# Altium PCB BEAGLEPLAYV020_220915.brd.PcbDoc (part 1 of 12)
Units mil, origin at the board's own origin, x right, y up, seen from the top; angles counter-clockwise.
Board outline 3149.7 x 3149.7 mil, 8 copper layers (TOP, LYR2_GND, LYR3, LAY4_PWR1, LAY5_PWR2, LAY6, LYR7_GND, BOTTOM), stack 60.84 mil thick; 782 components, 546 nets, 2864 pads, 2056 vias.
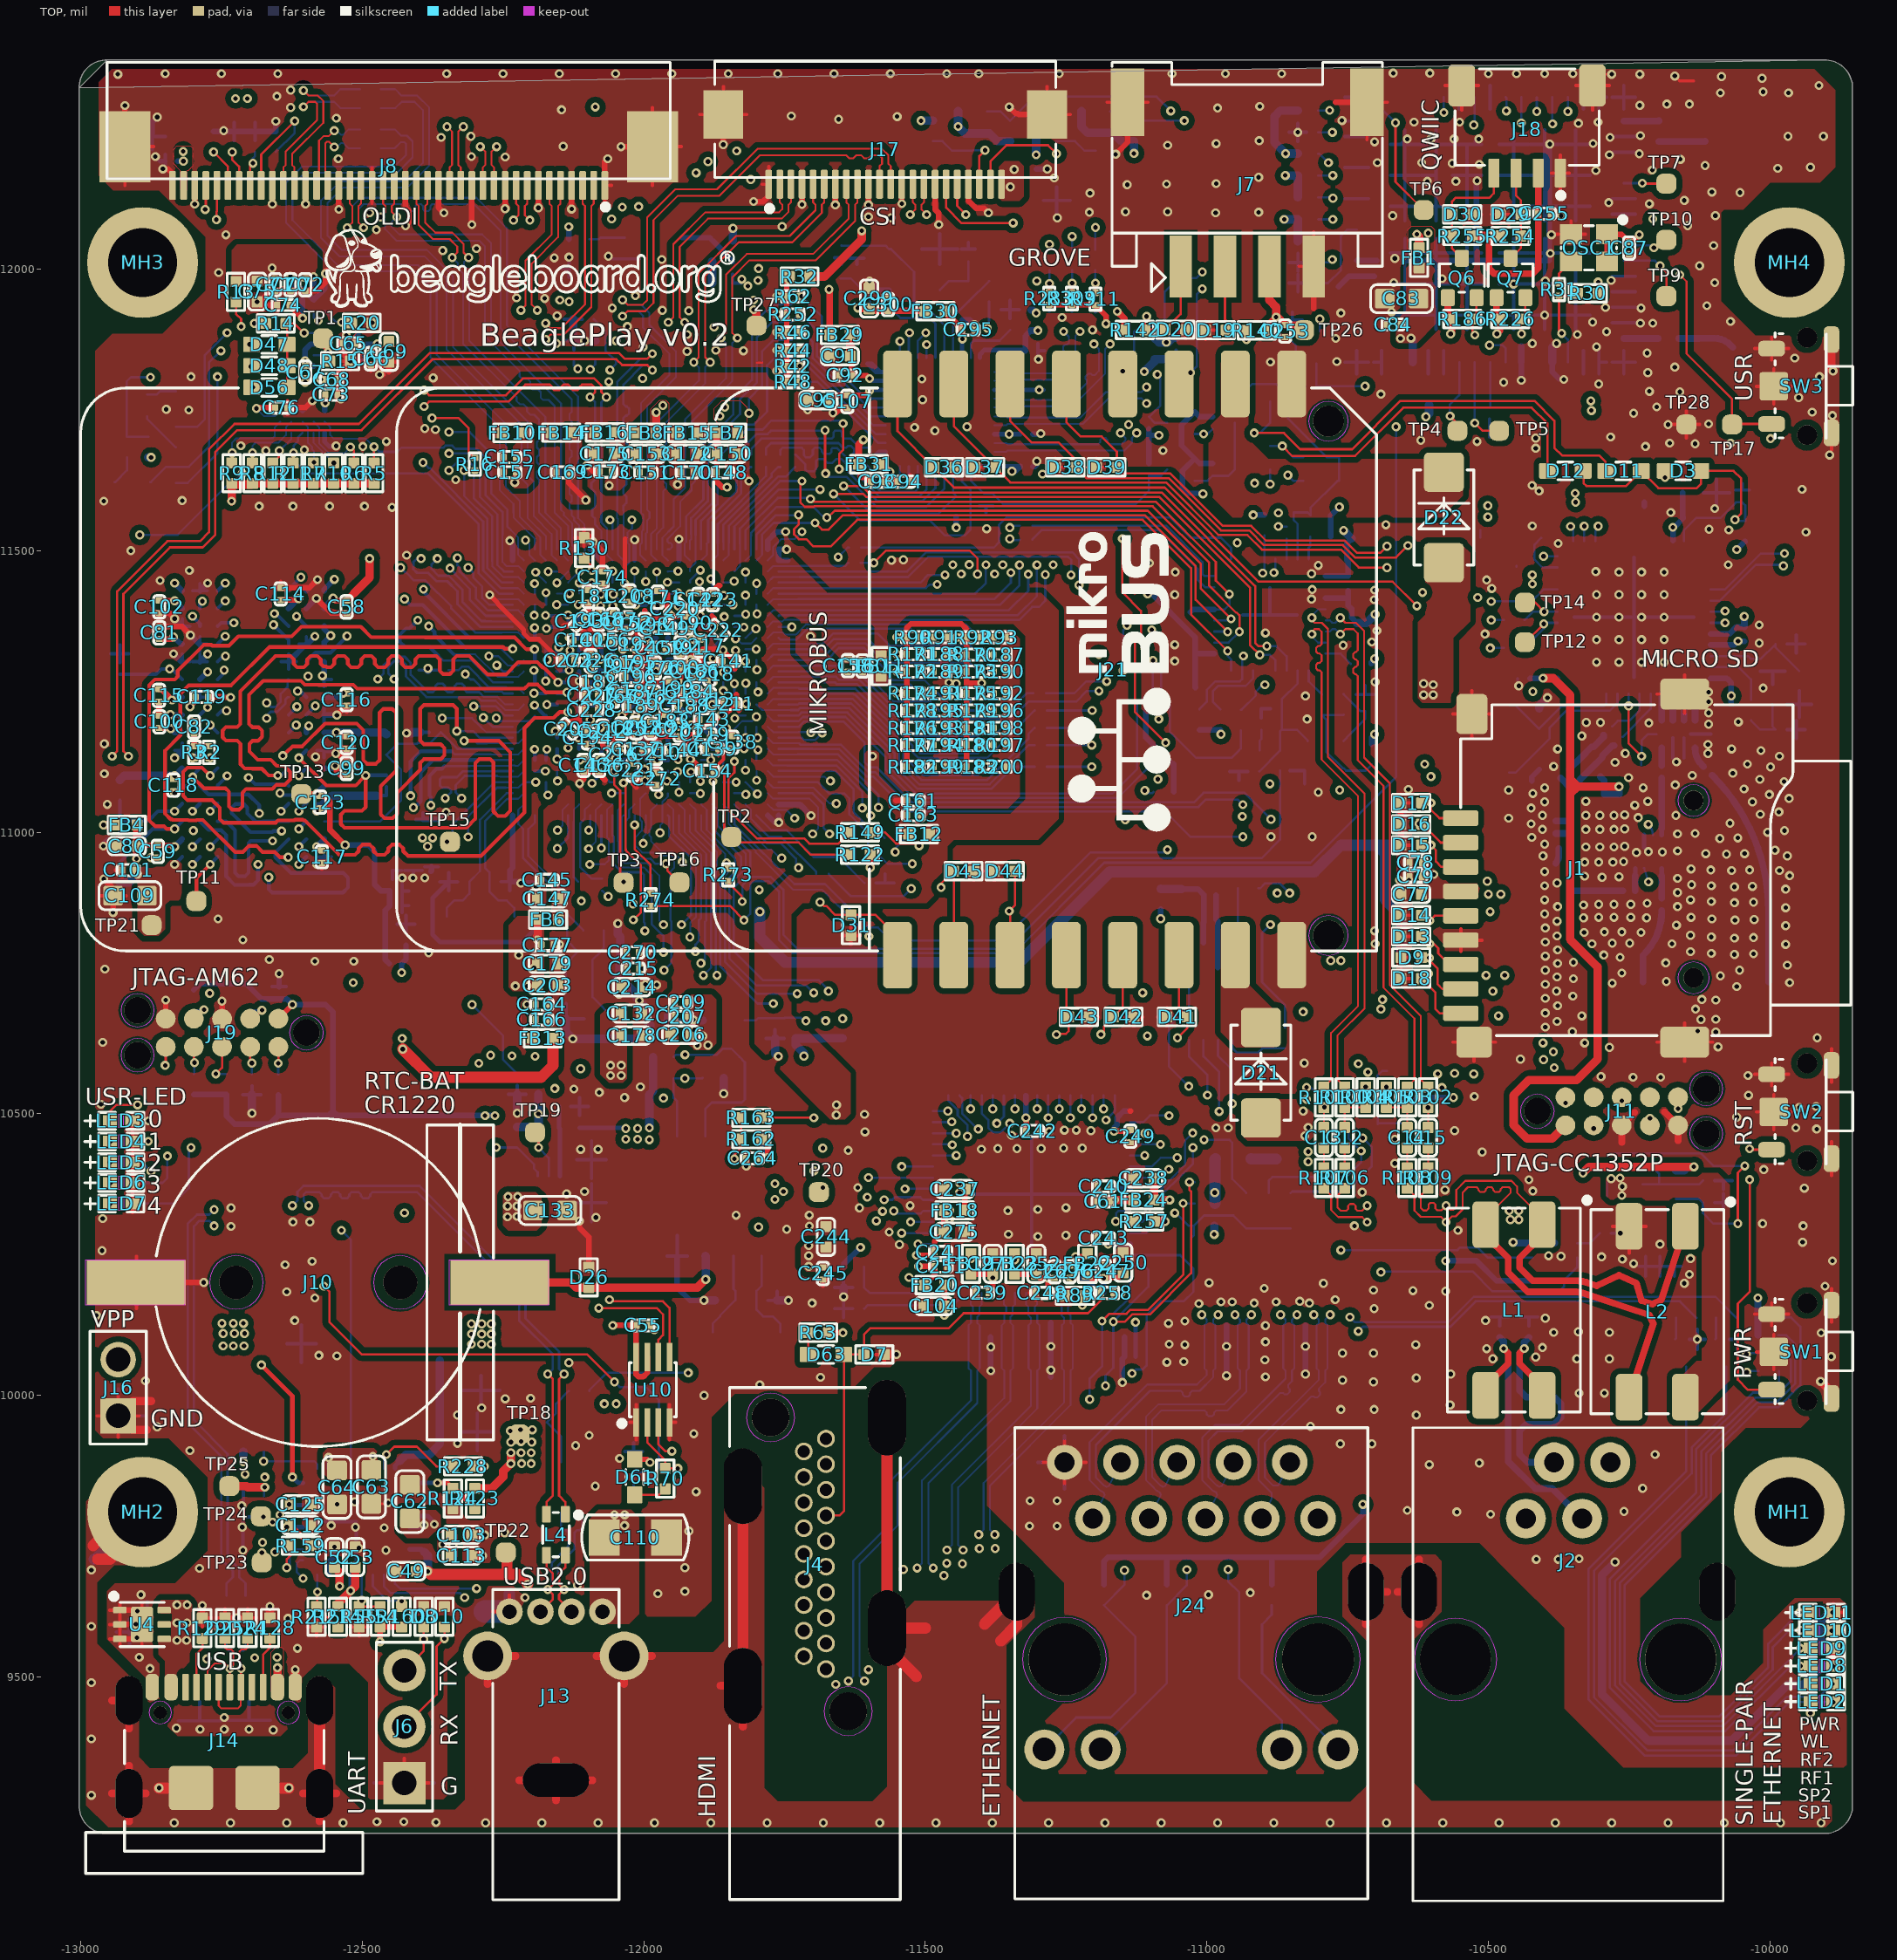
[diagram p0: TOP view]
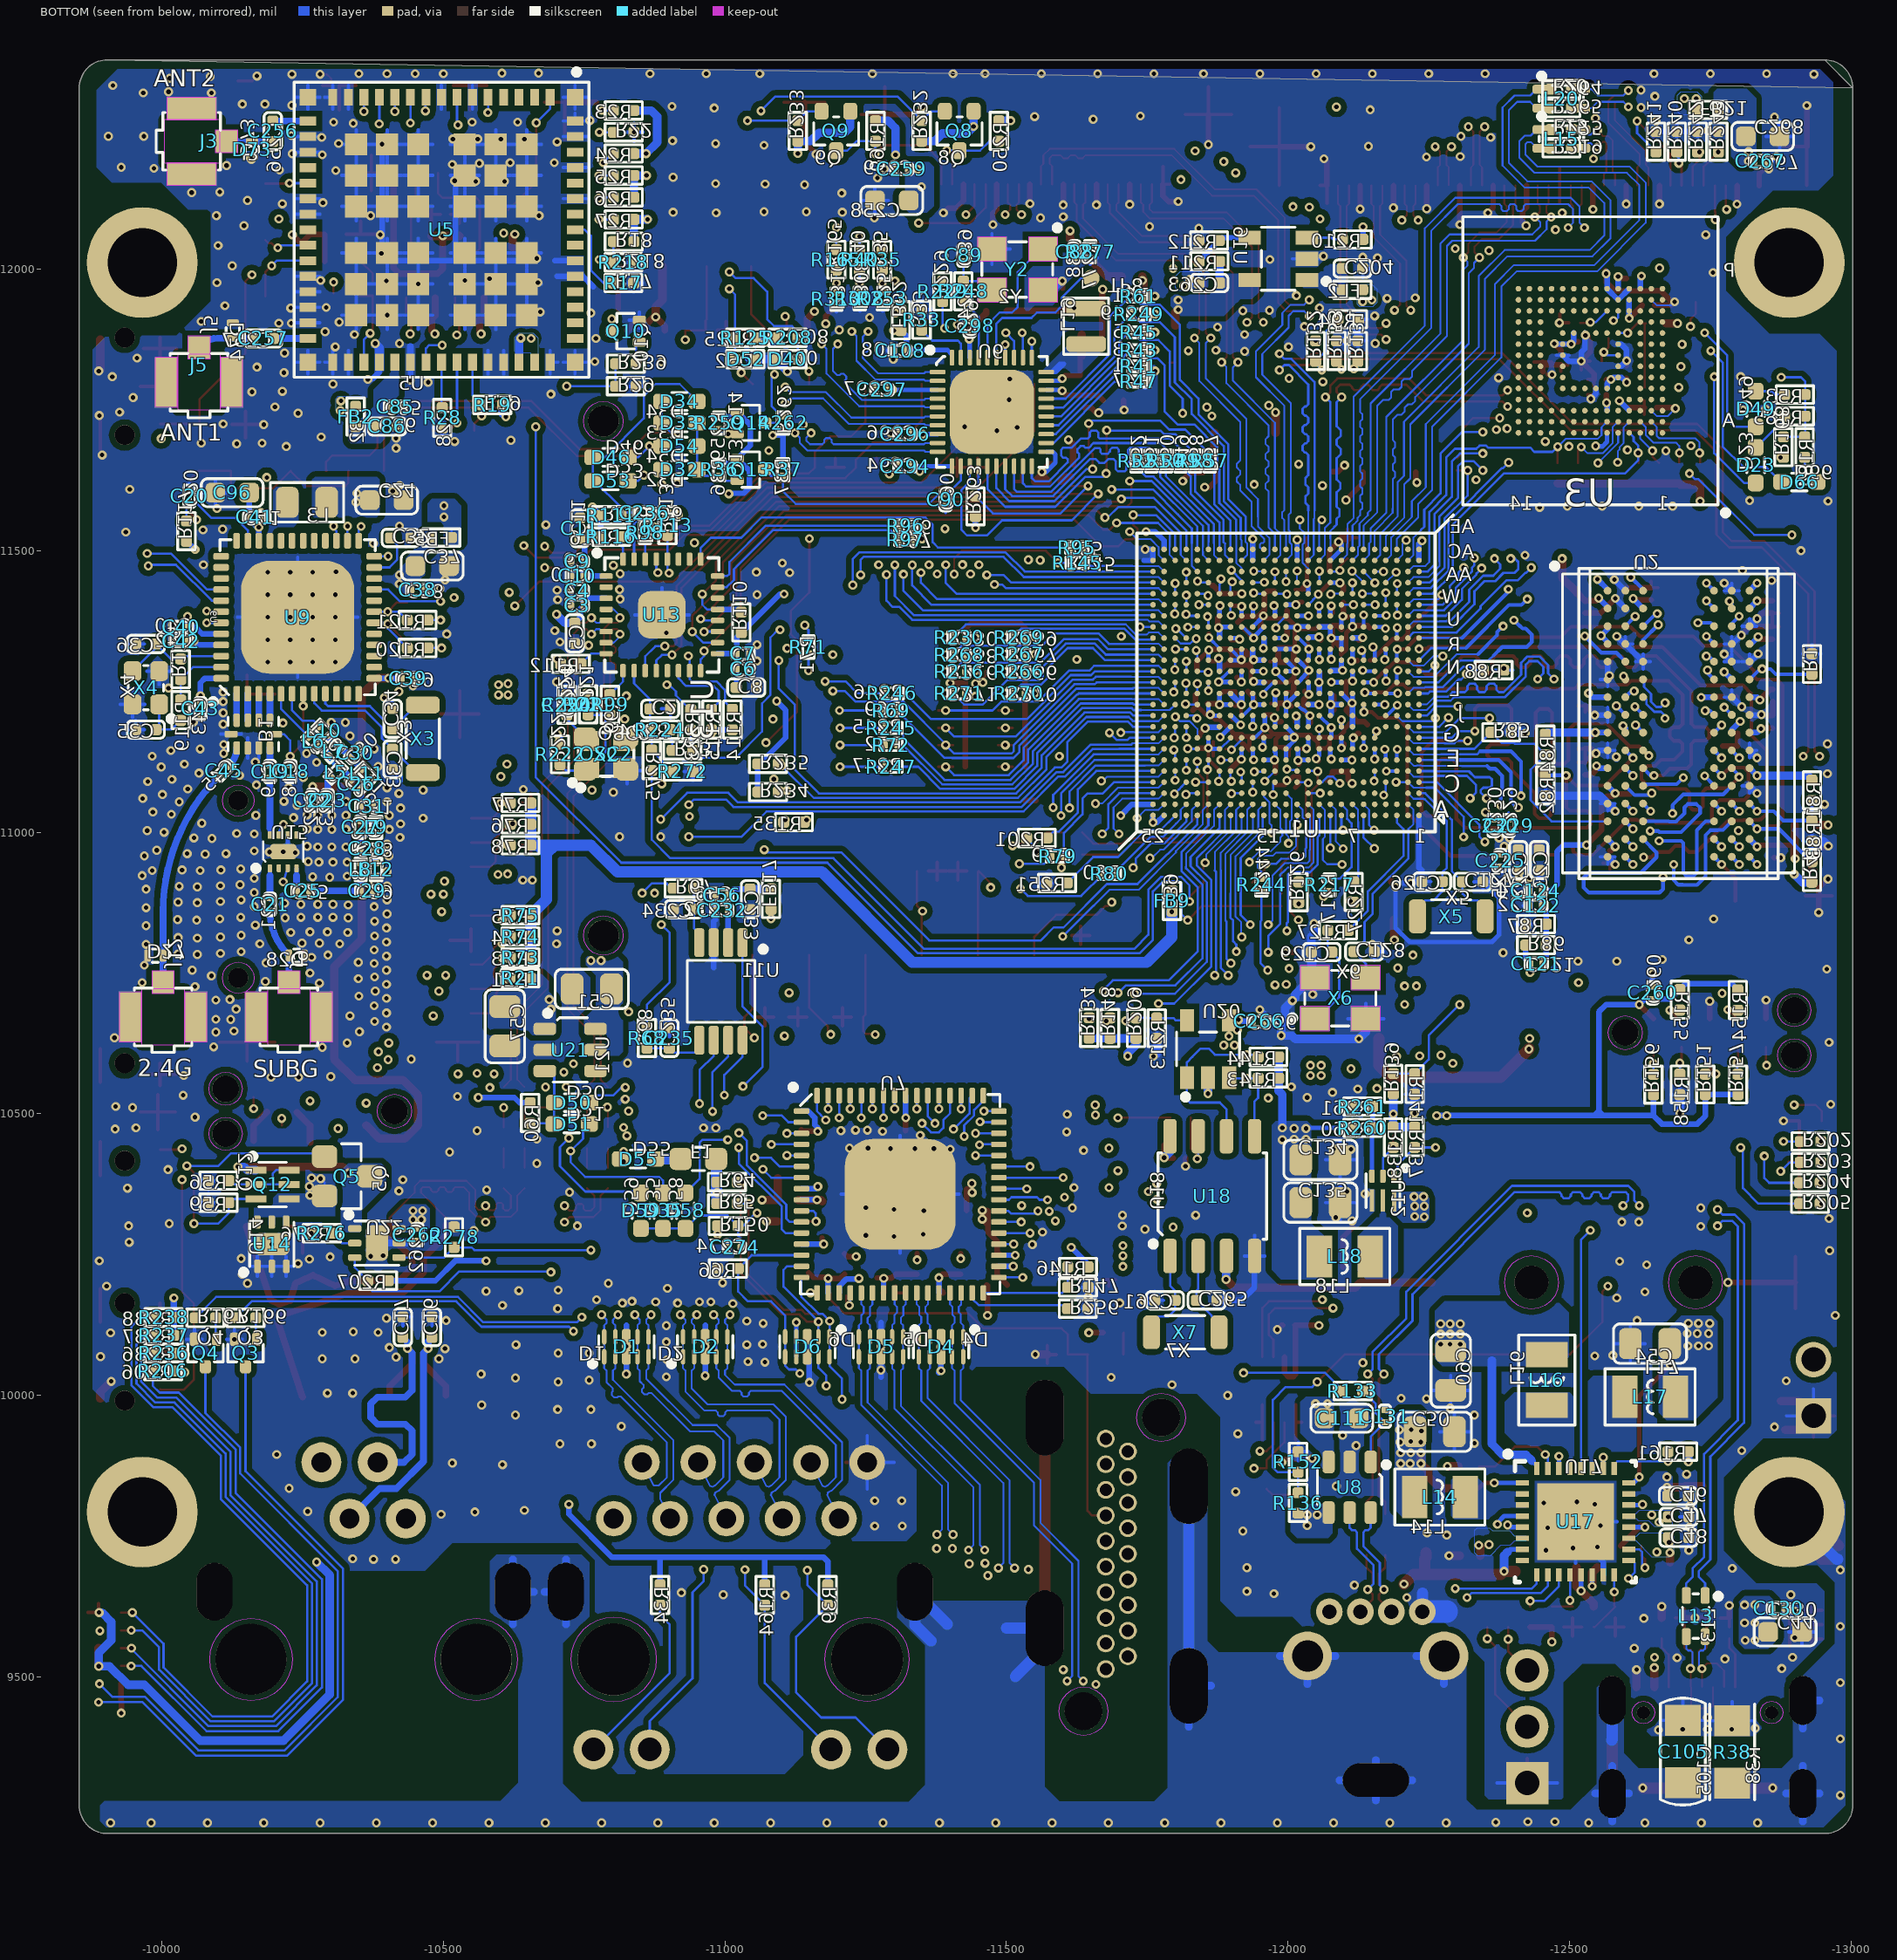
[diagram p1: BOTTOM view, seen from below]
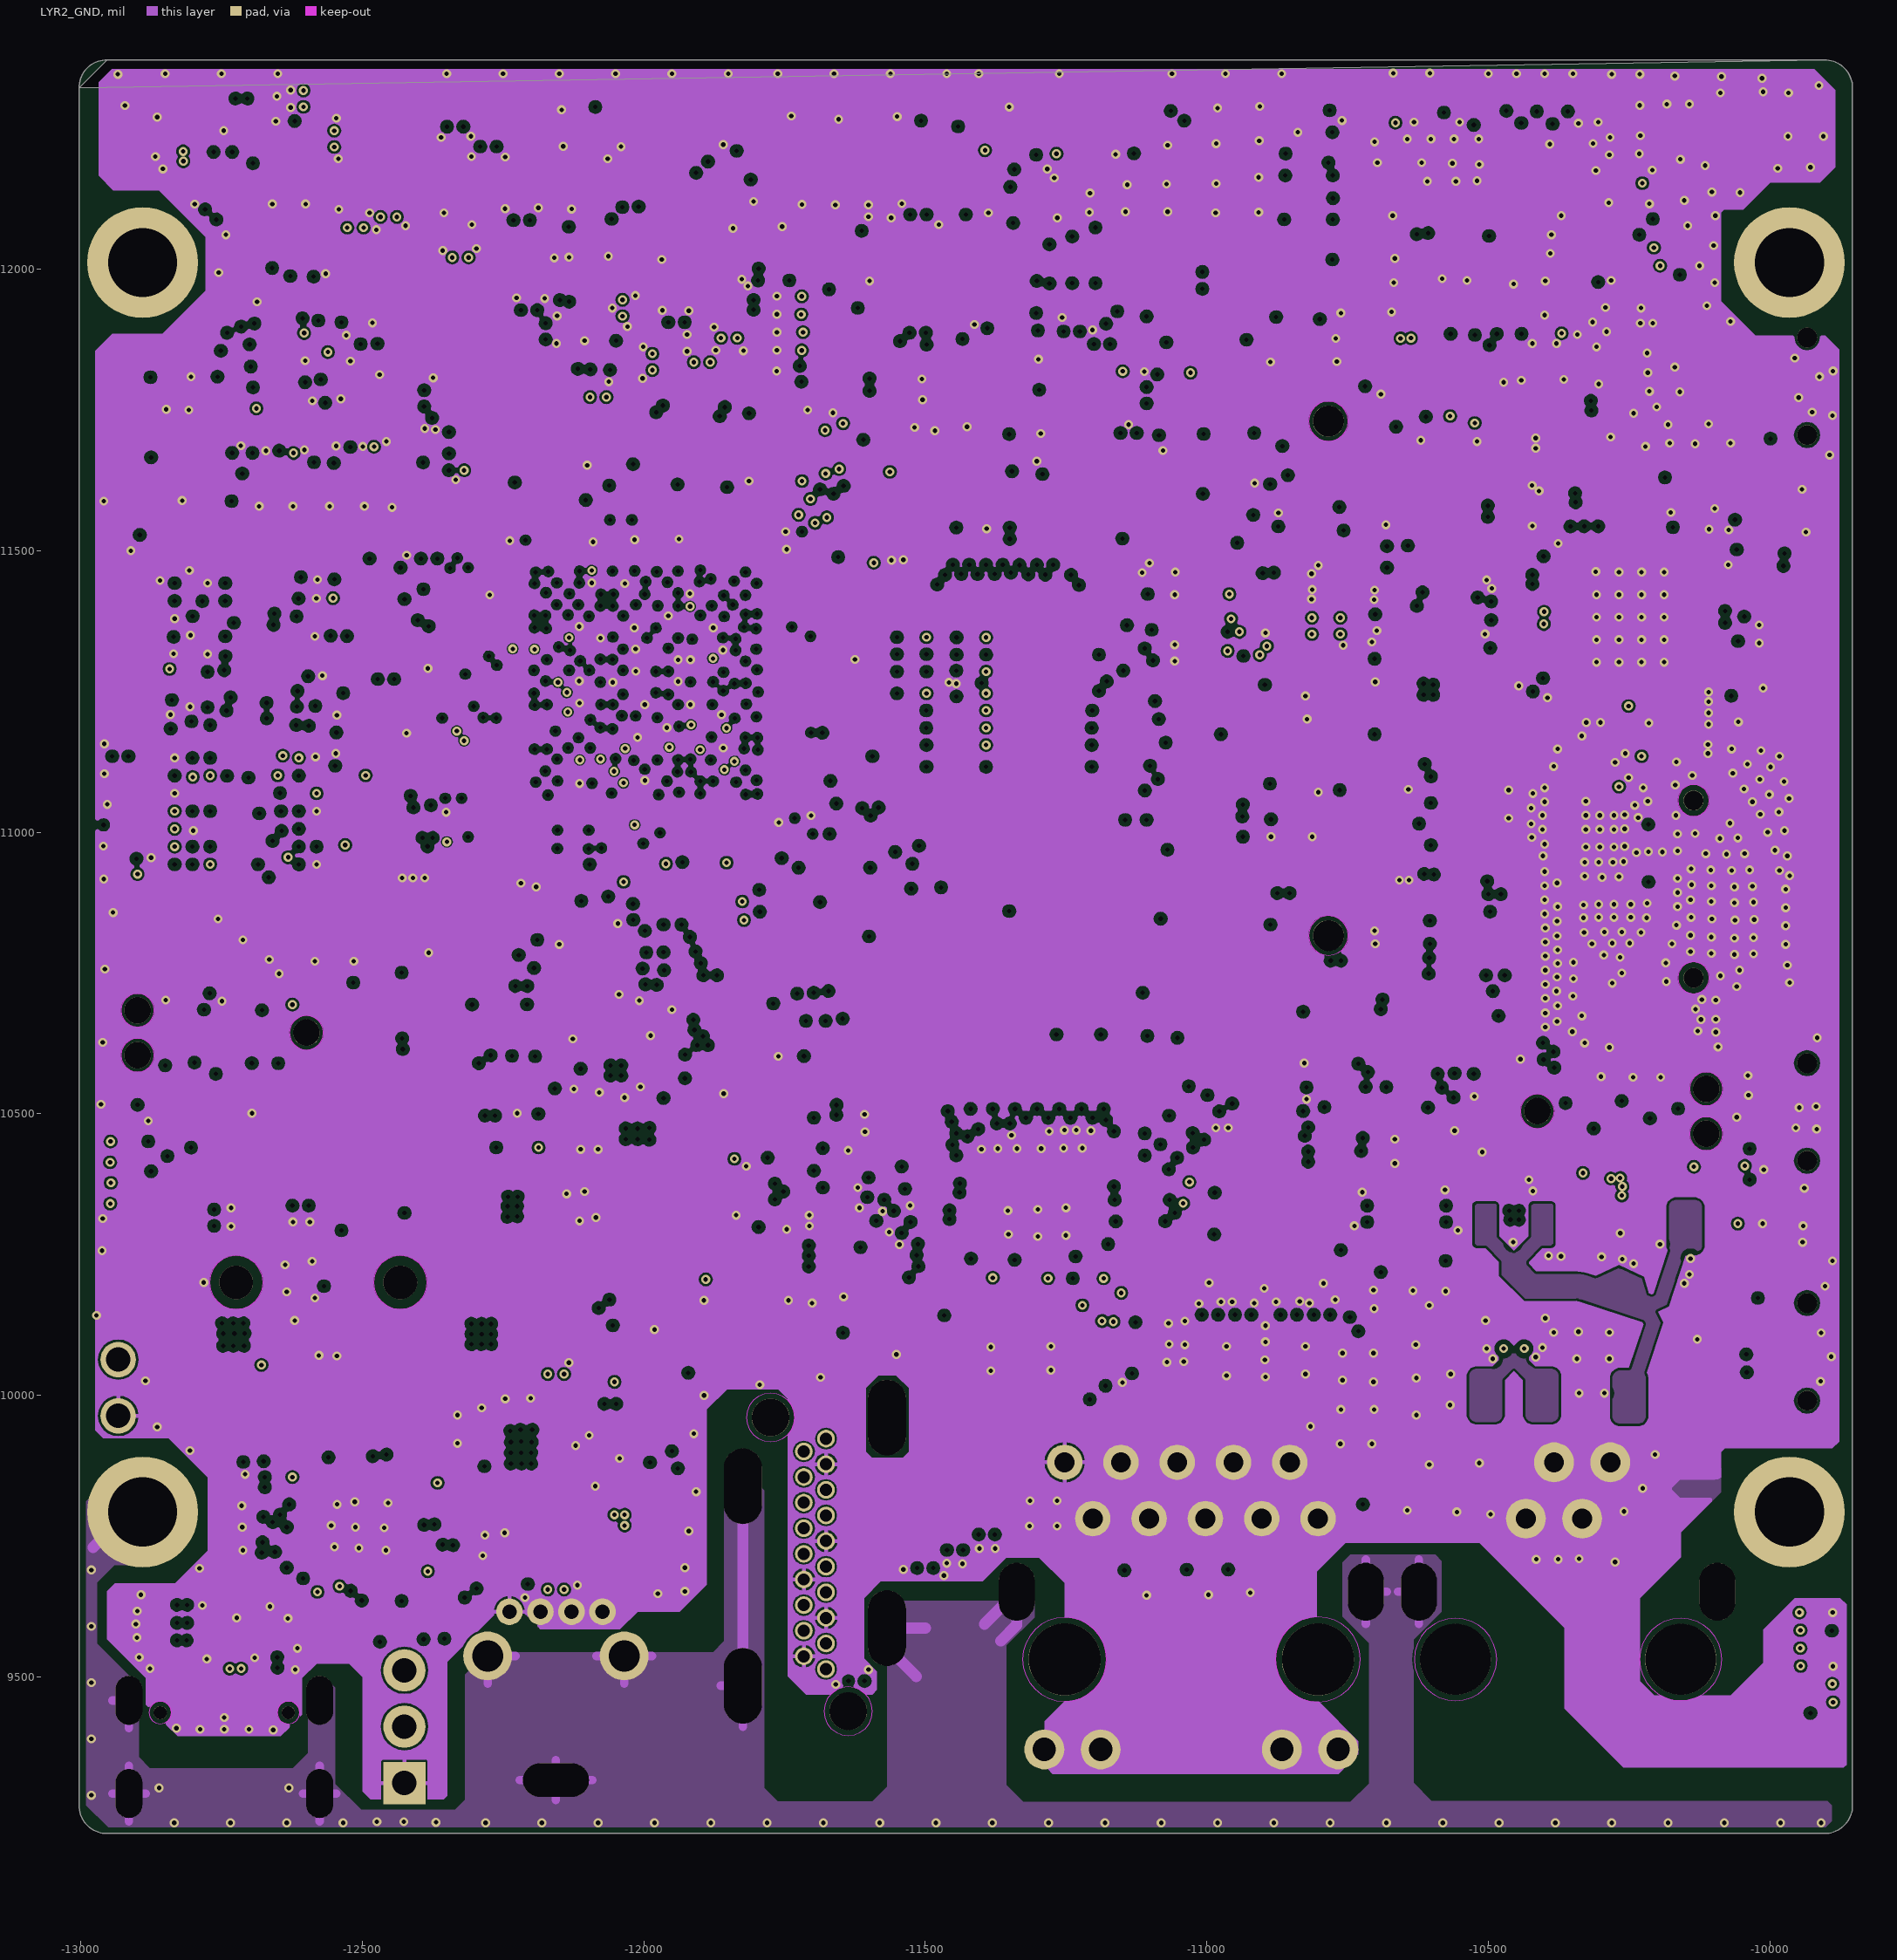
[diagram p2: LYR2_GND]
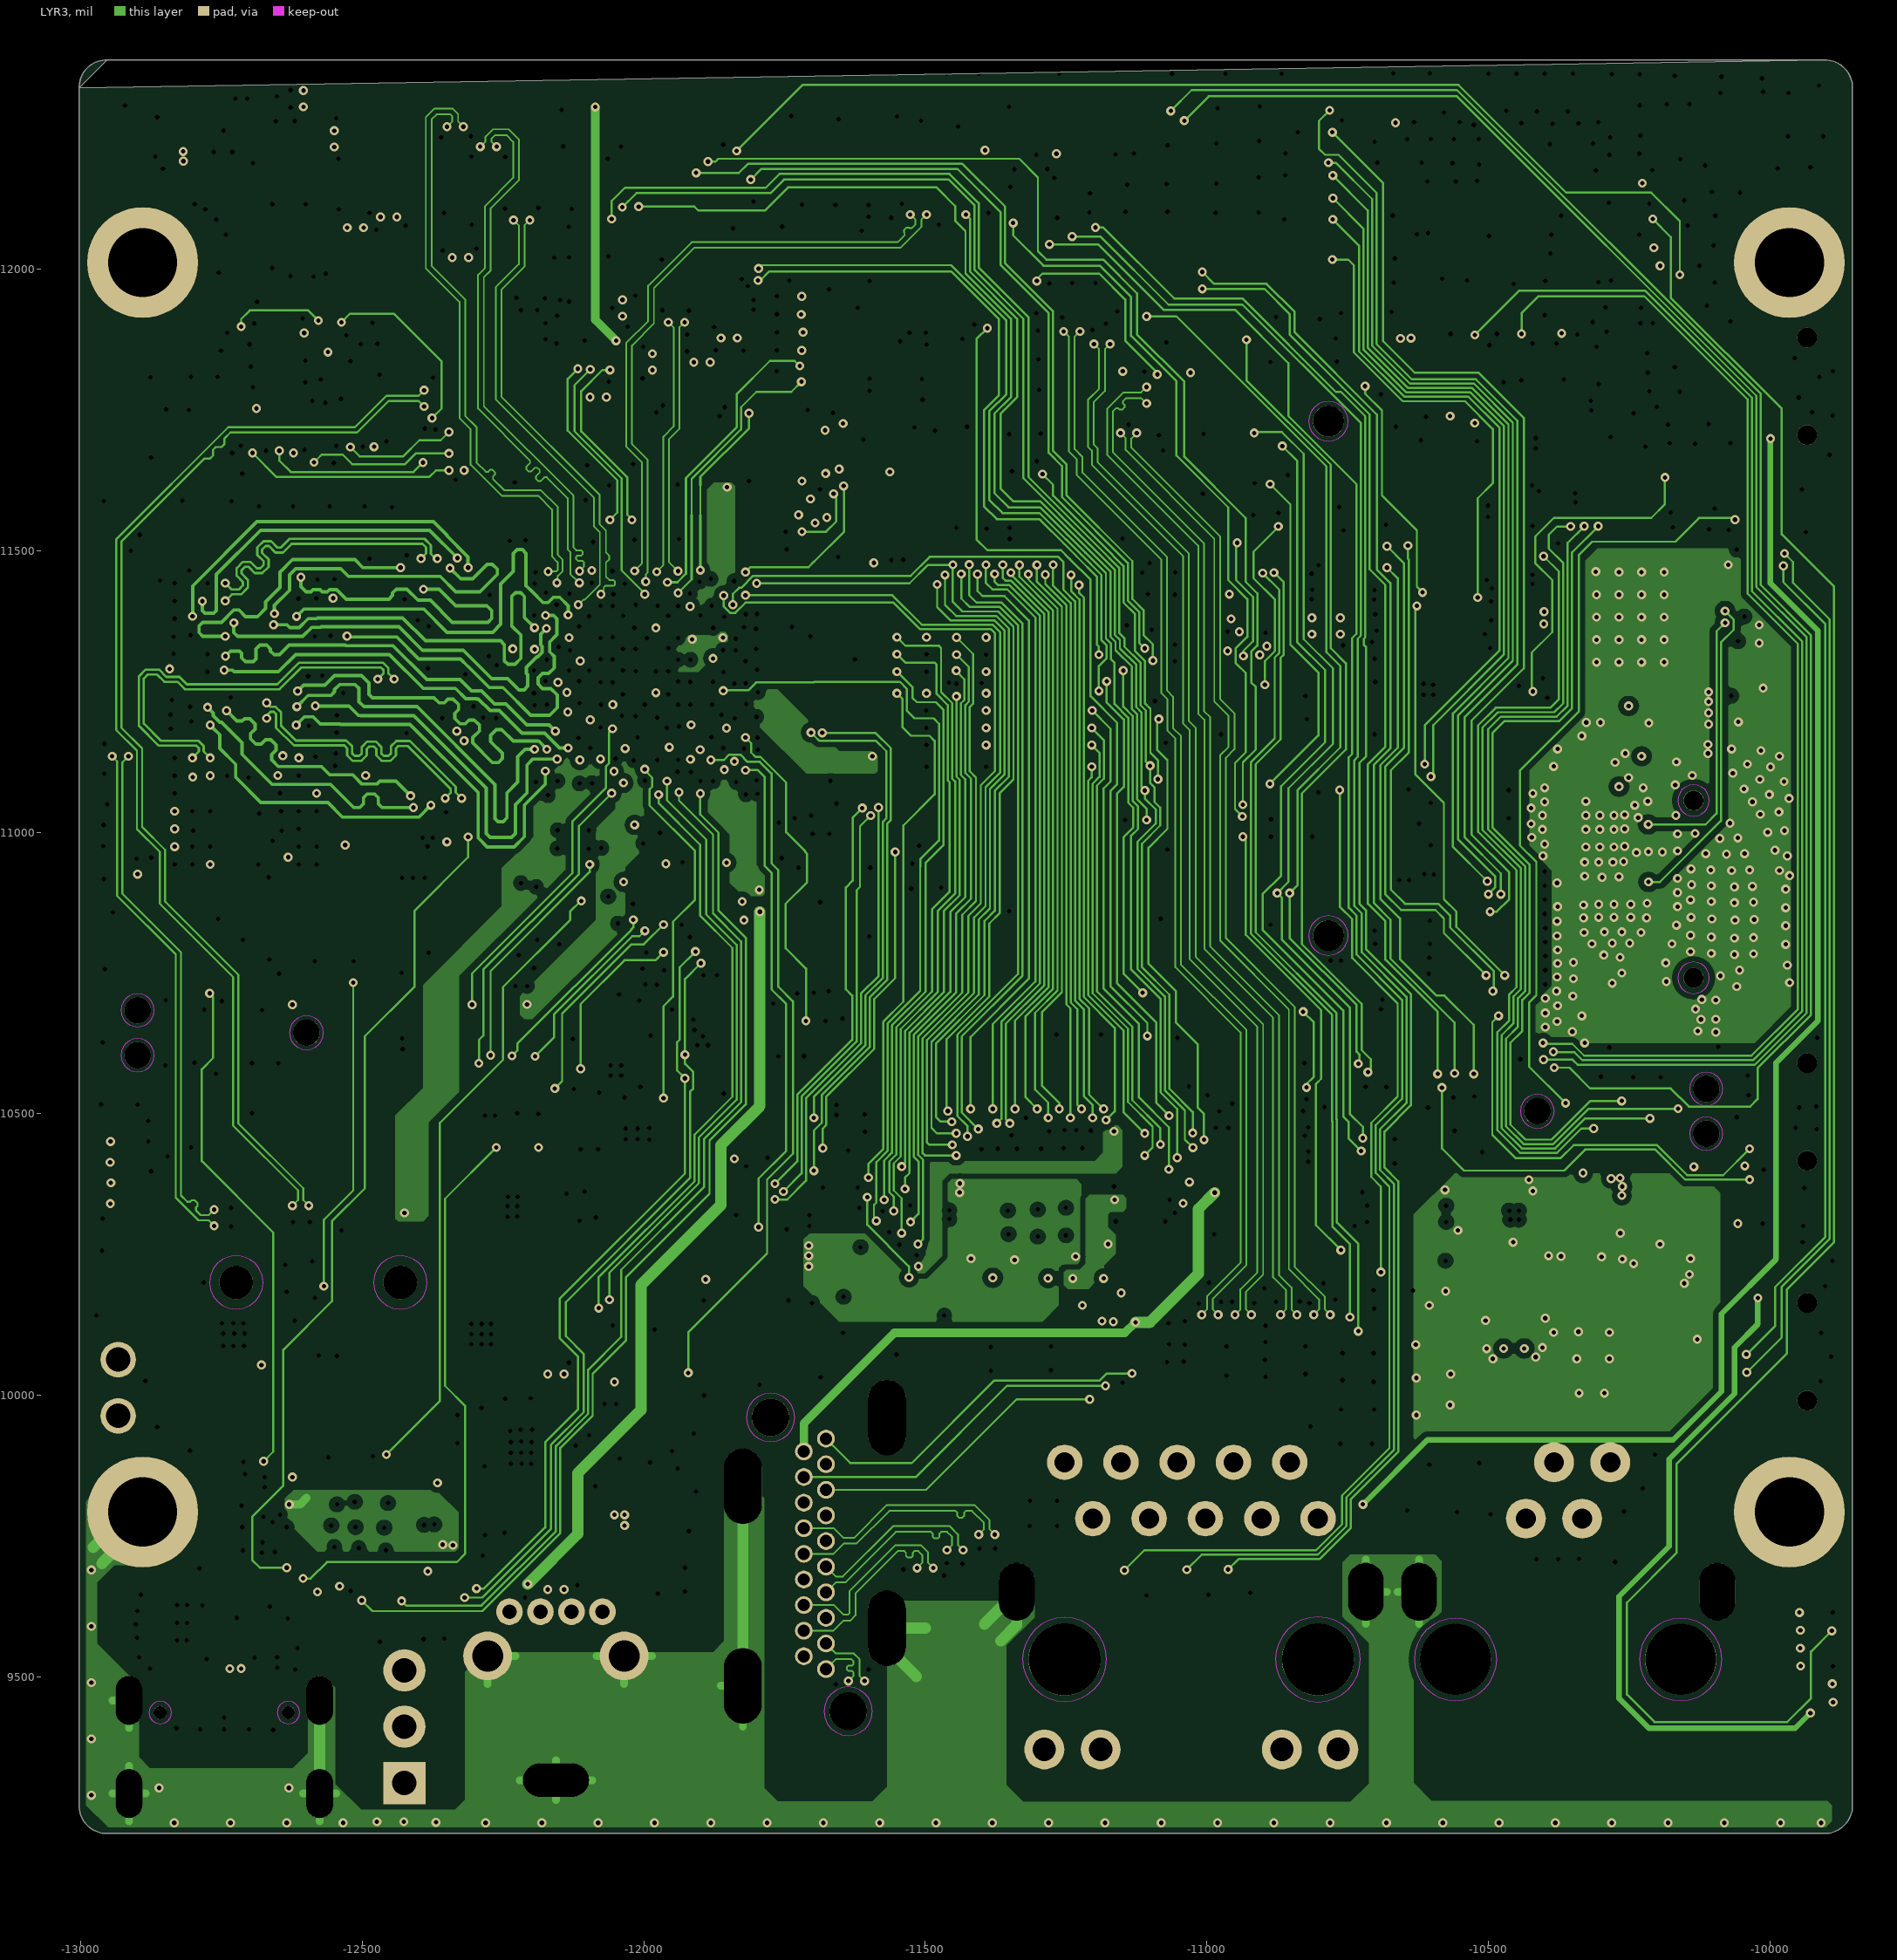
[diagram p3: LYR3]
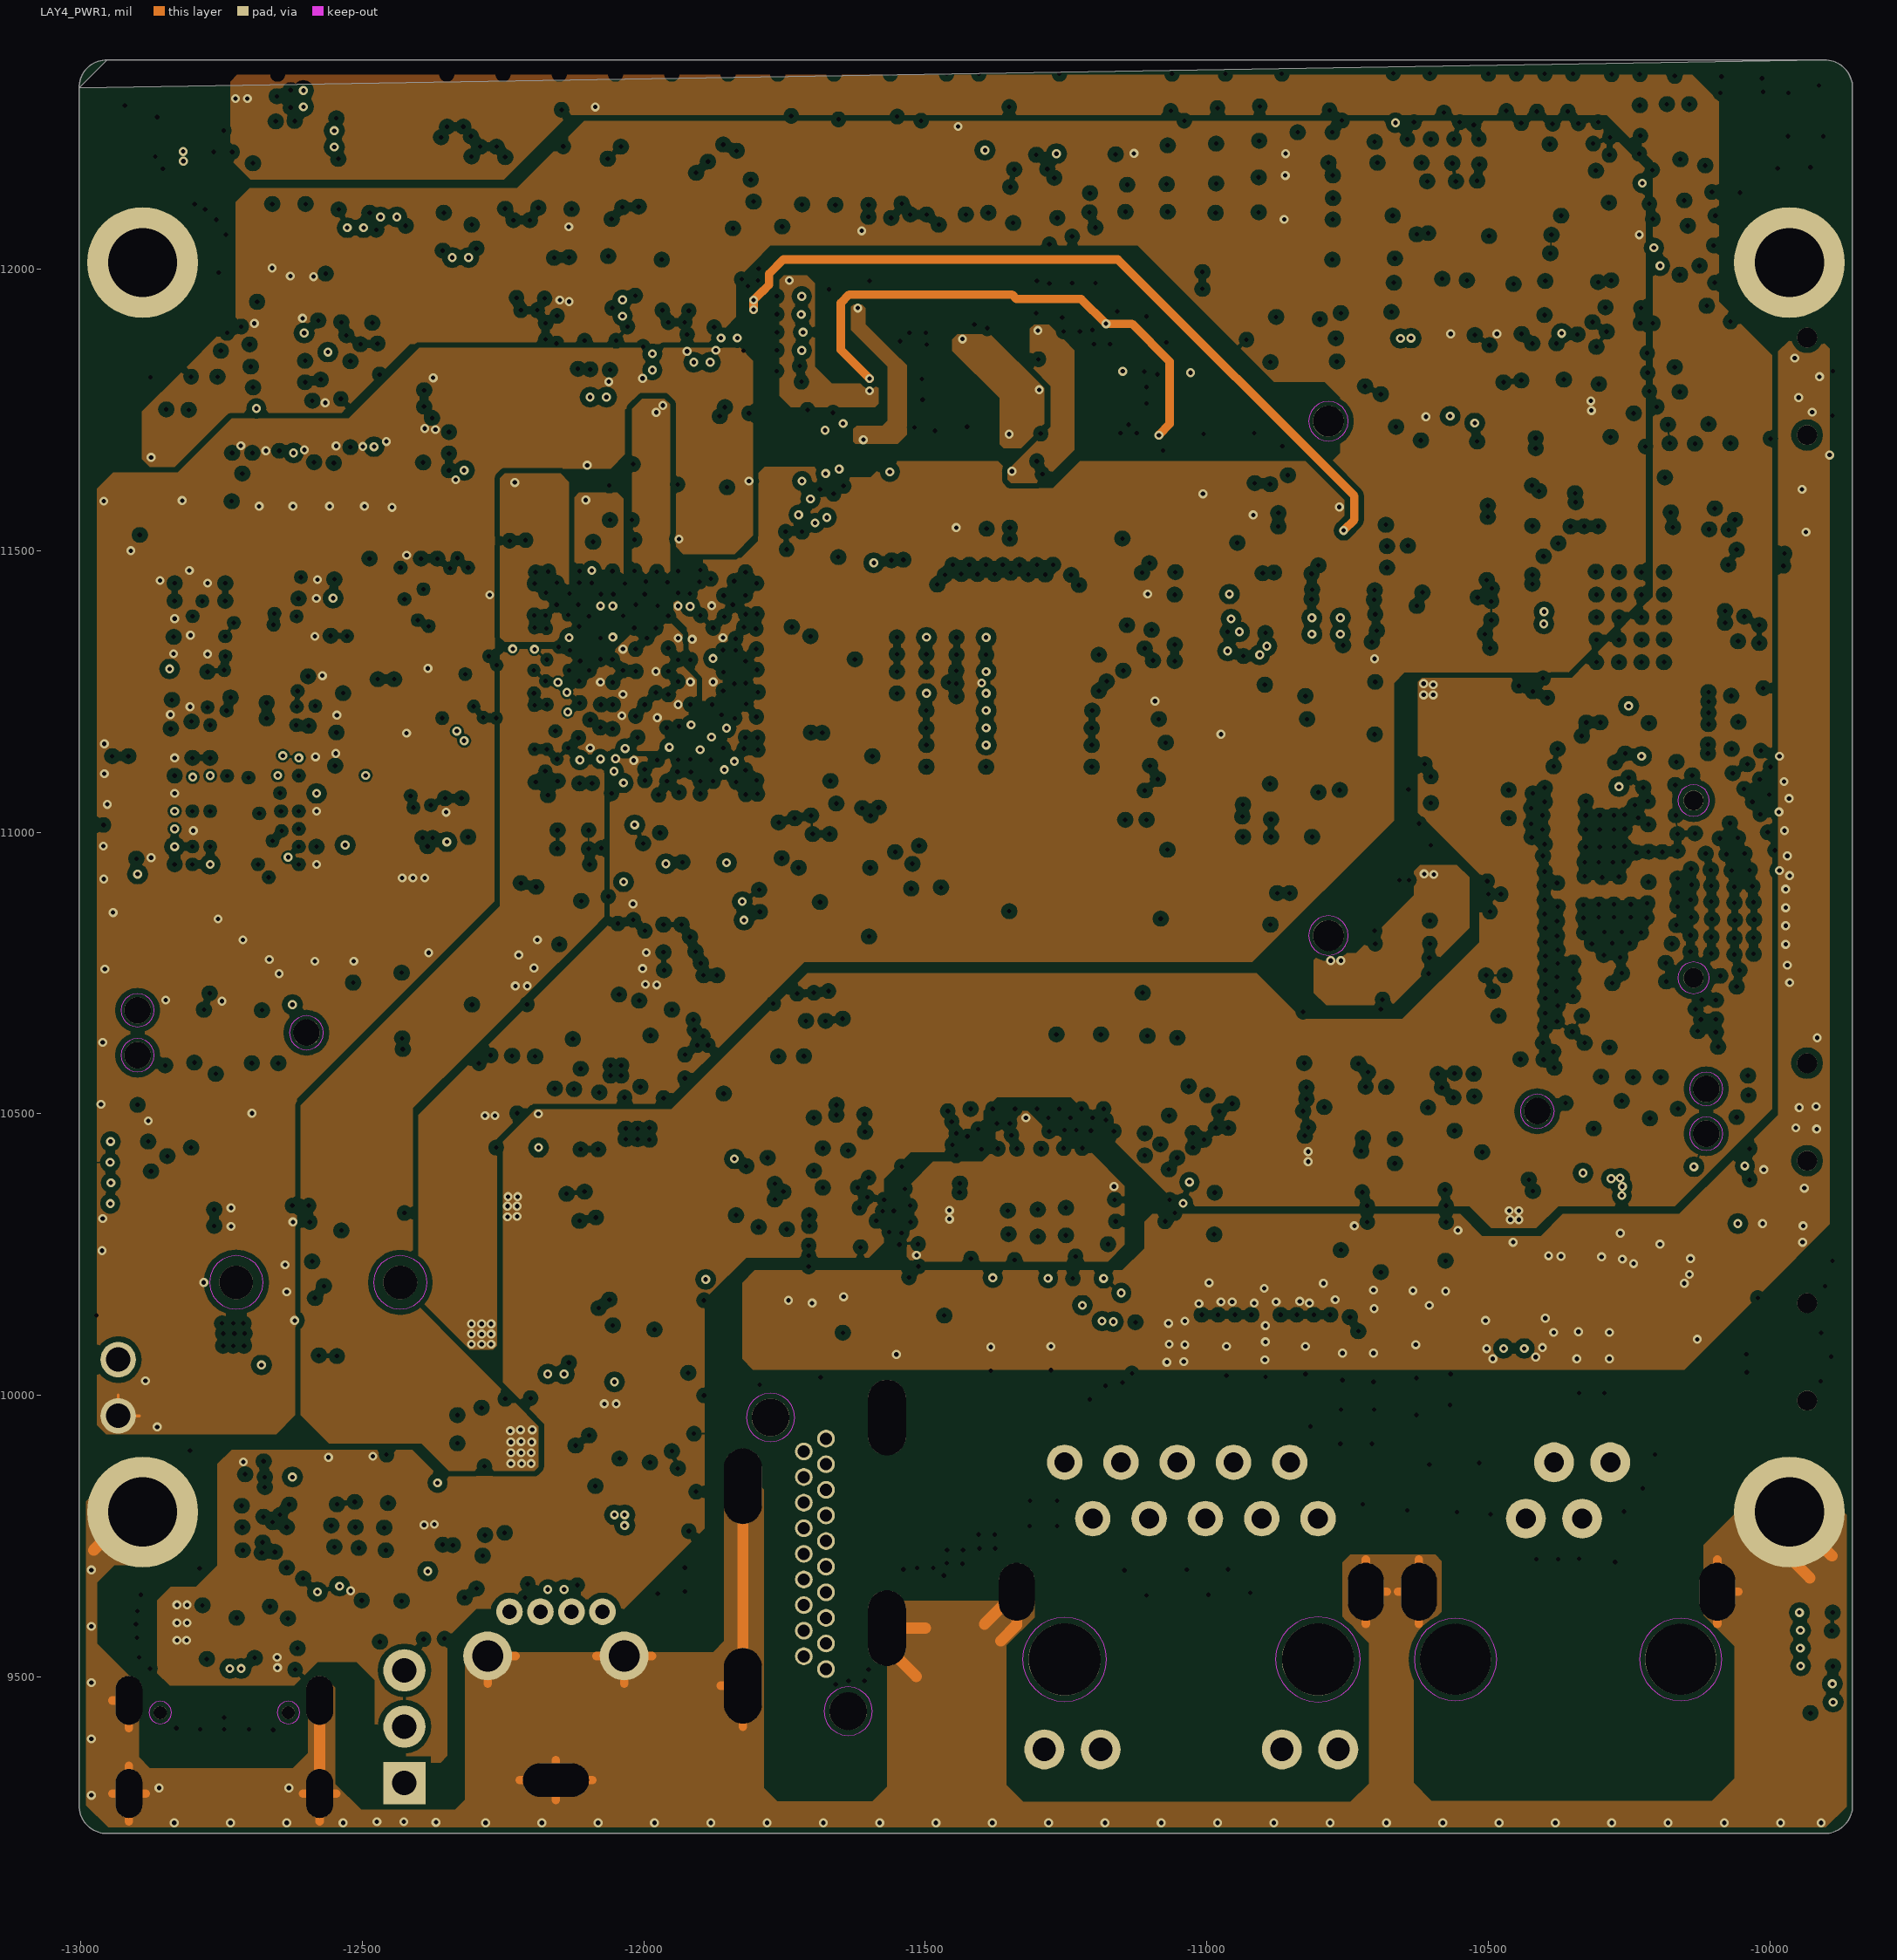
[diagram p4: LAY4_PWR1]
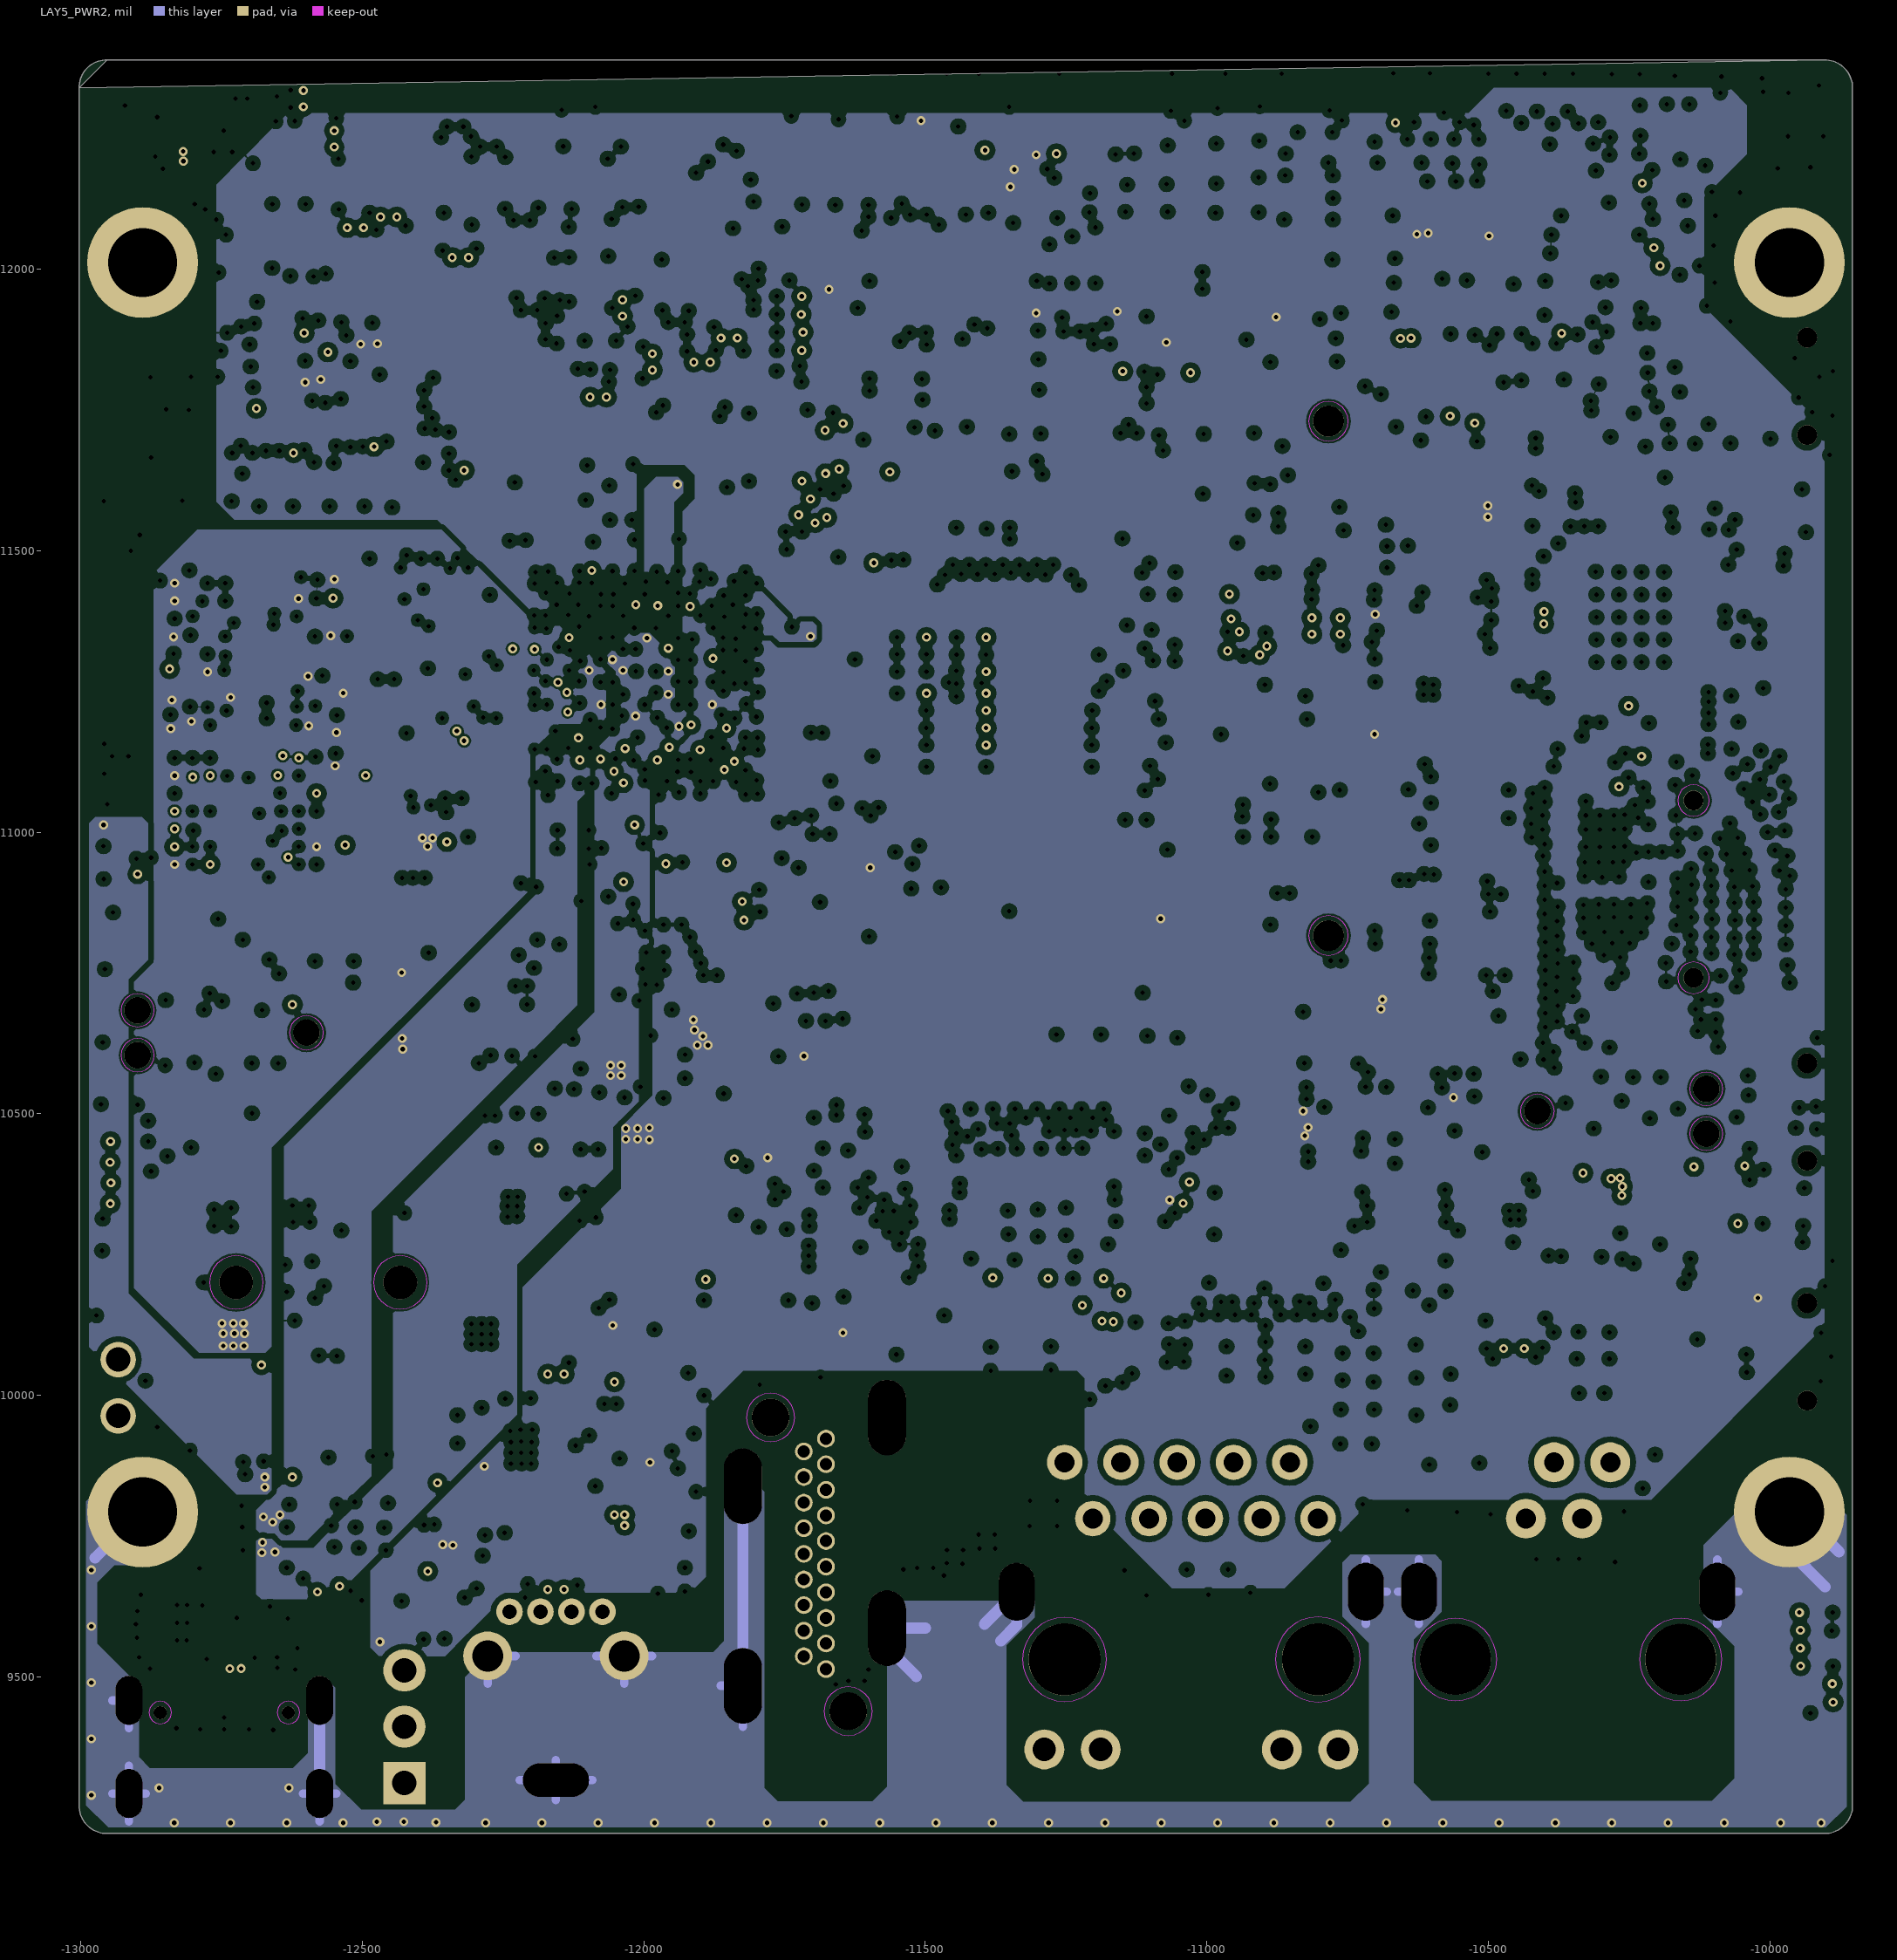
[diagram p5: LAY5_PWR2]
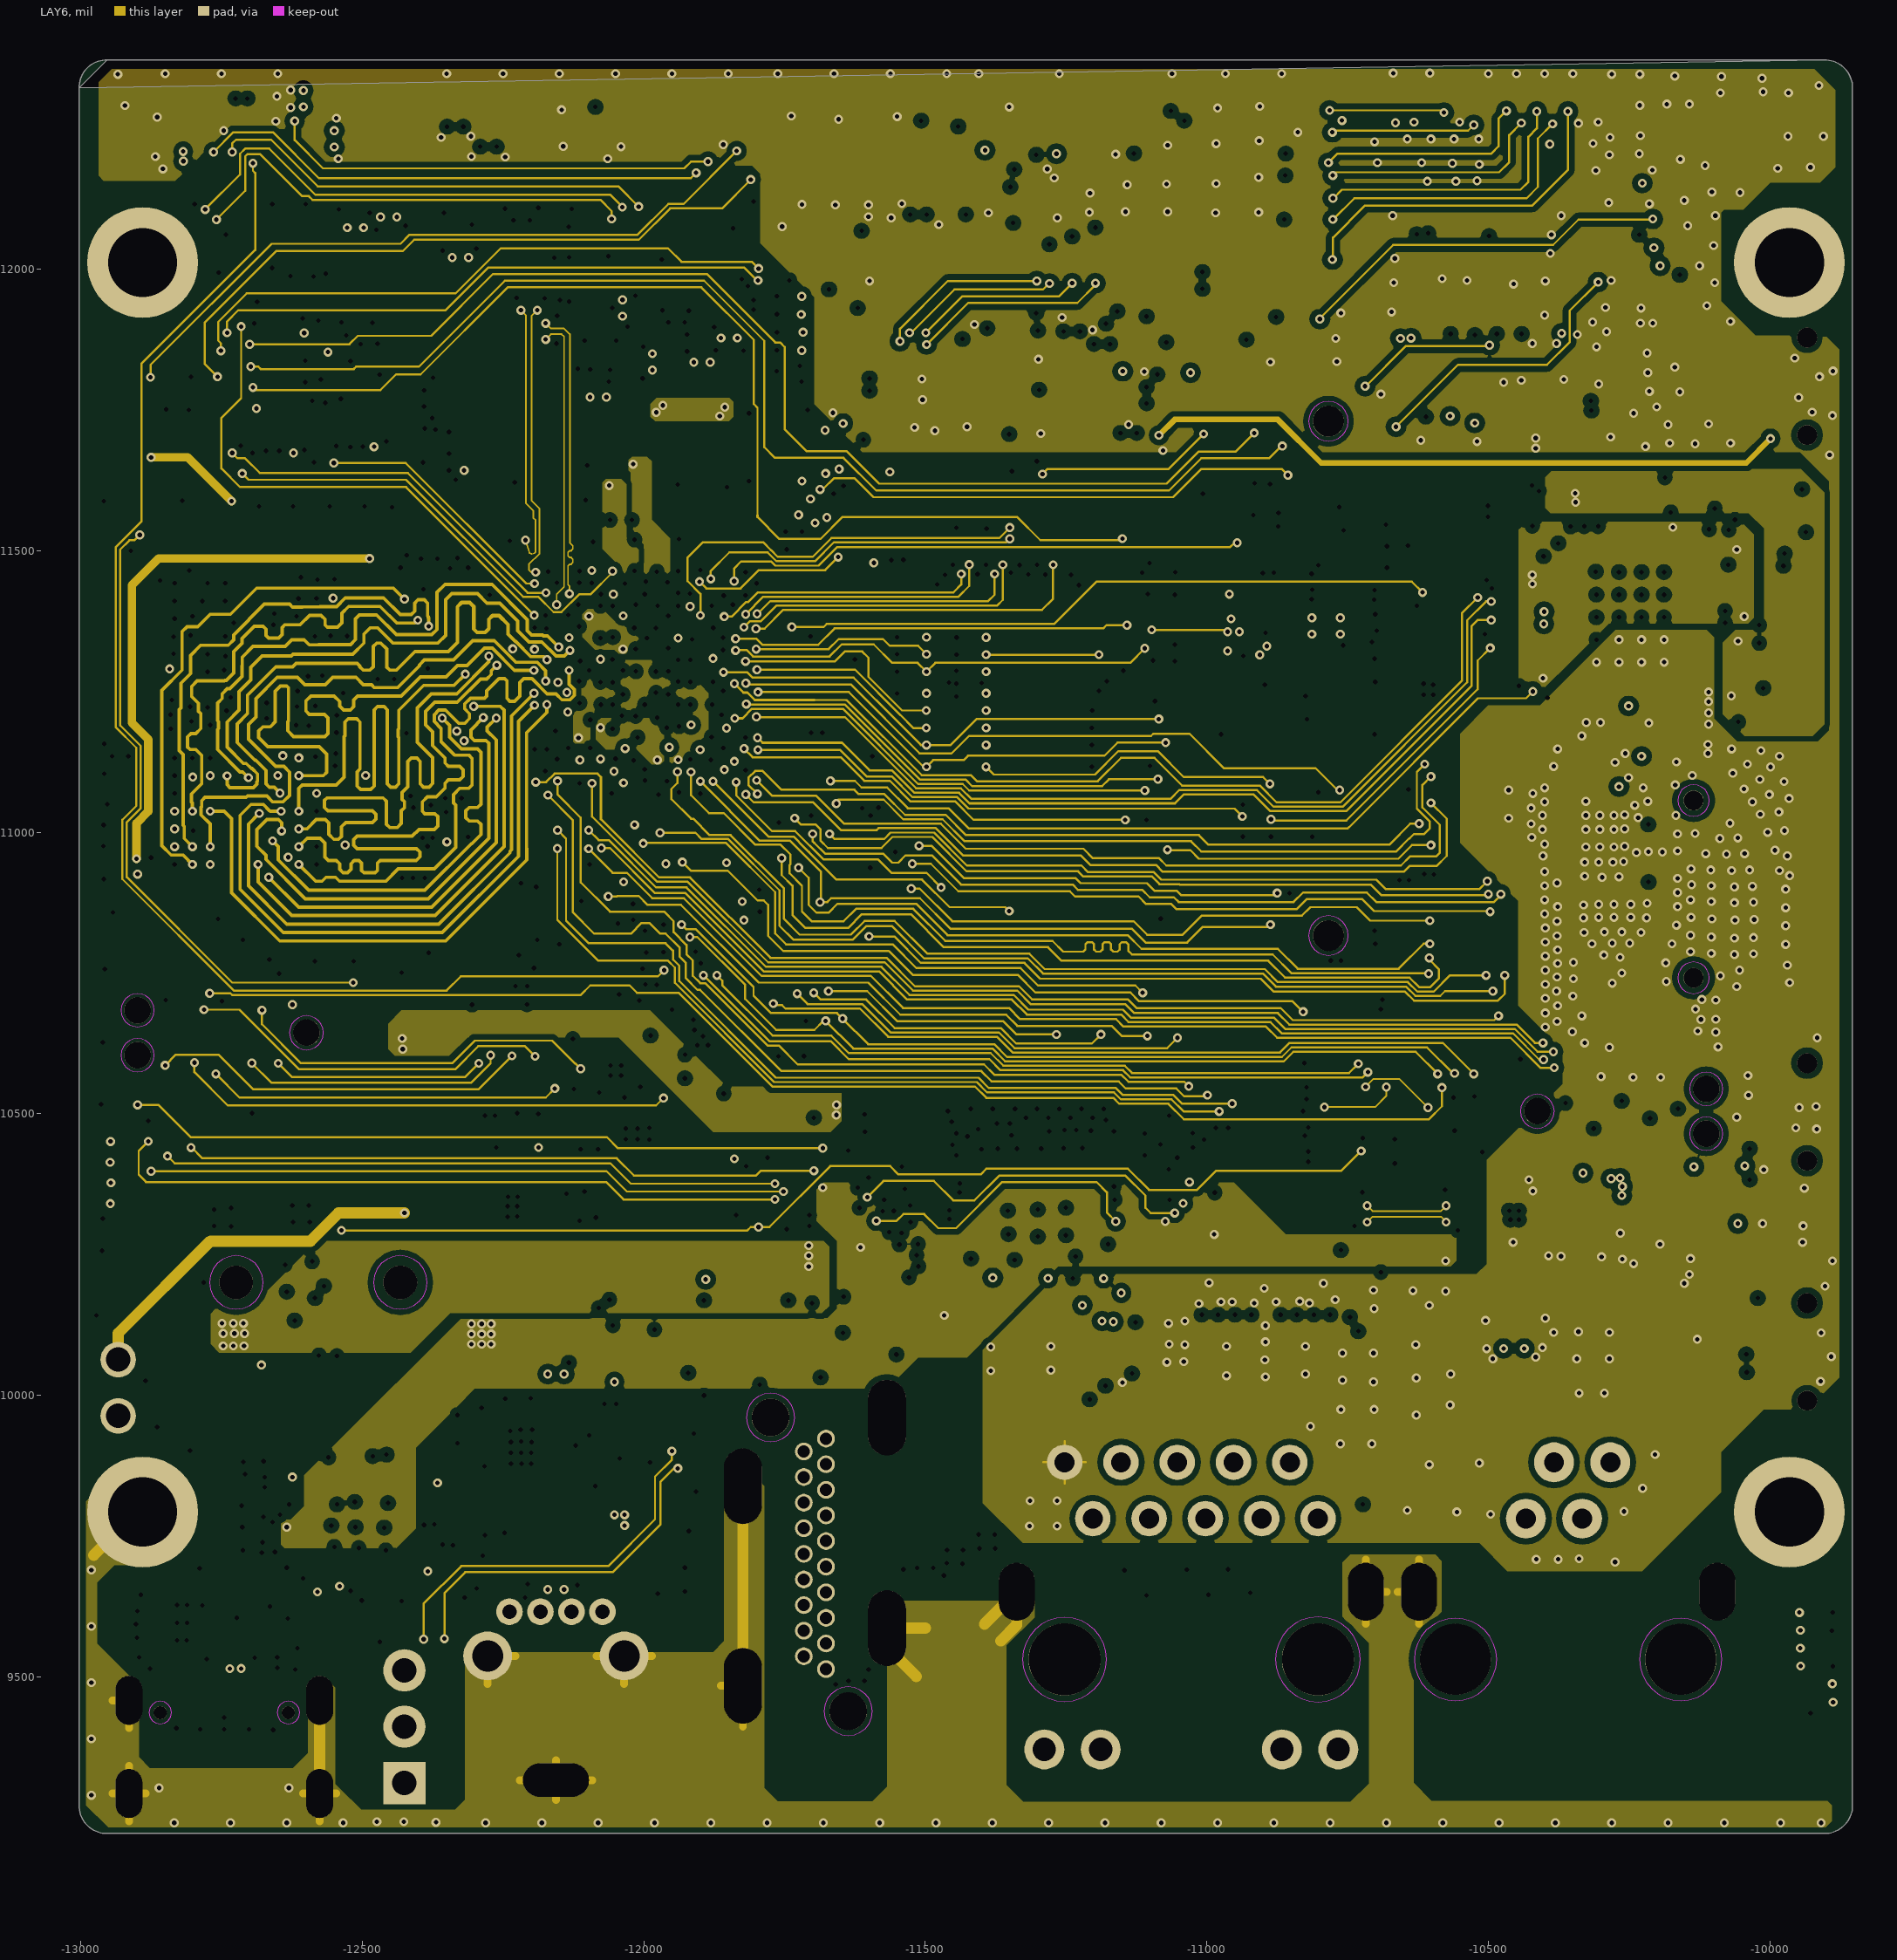
[diagram p6: LAY6]
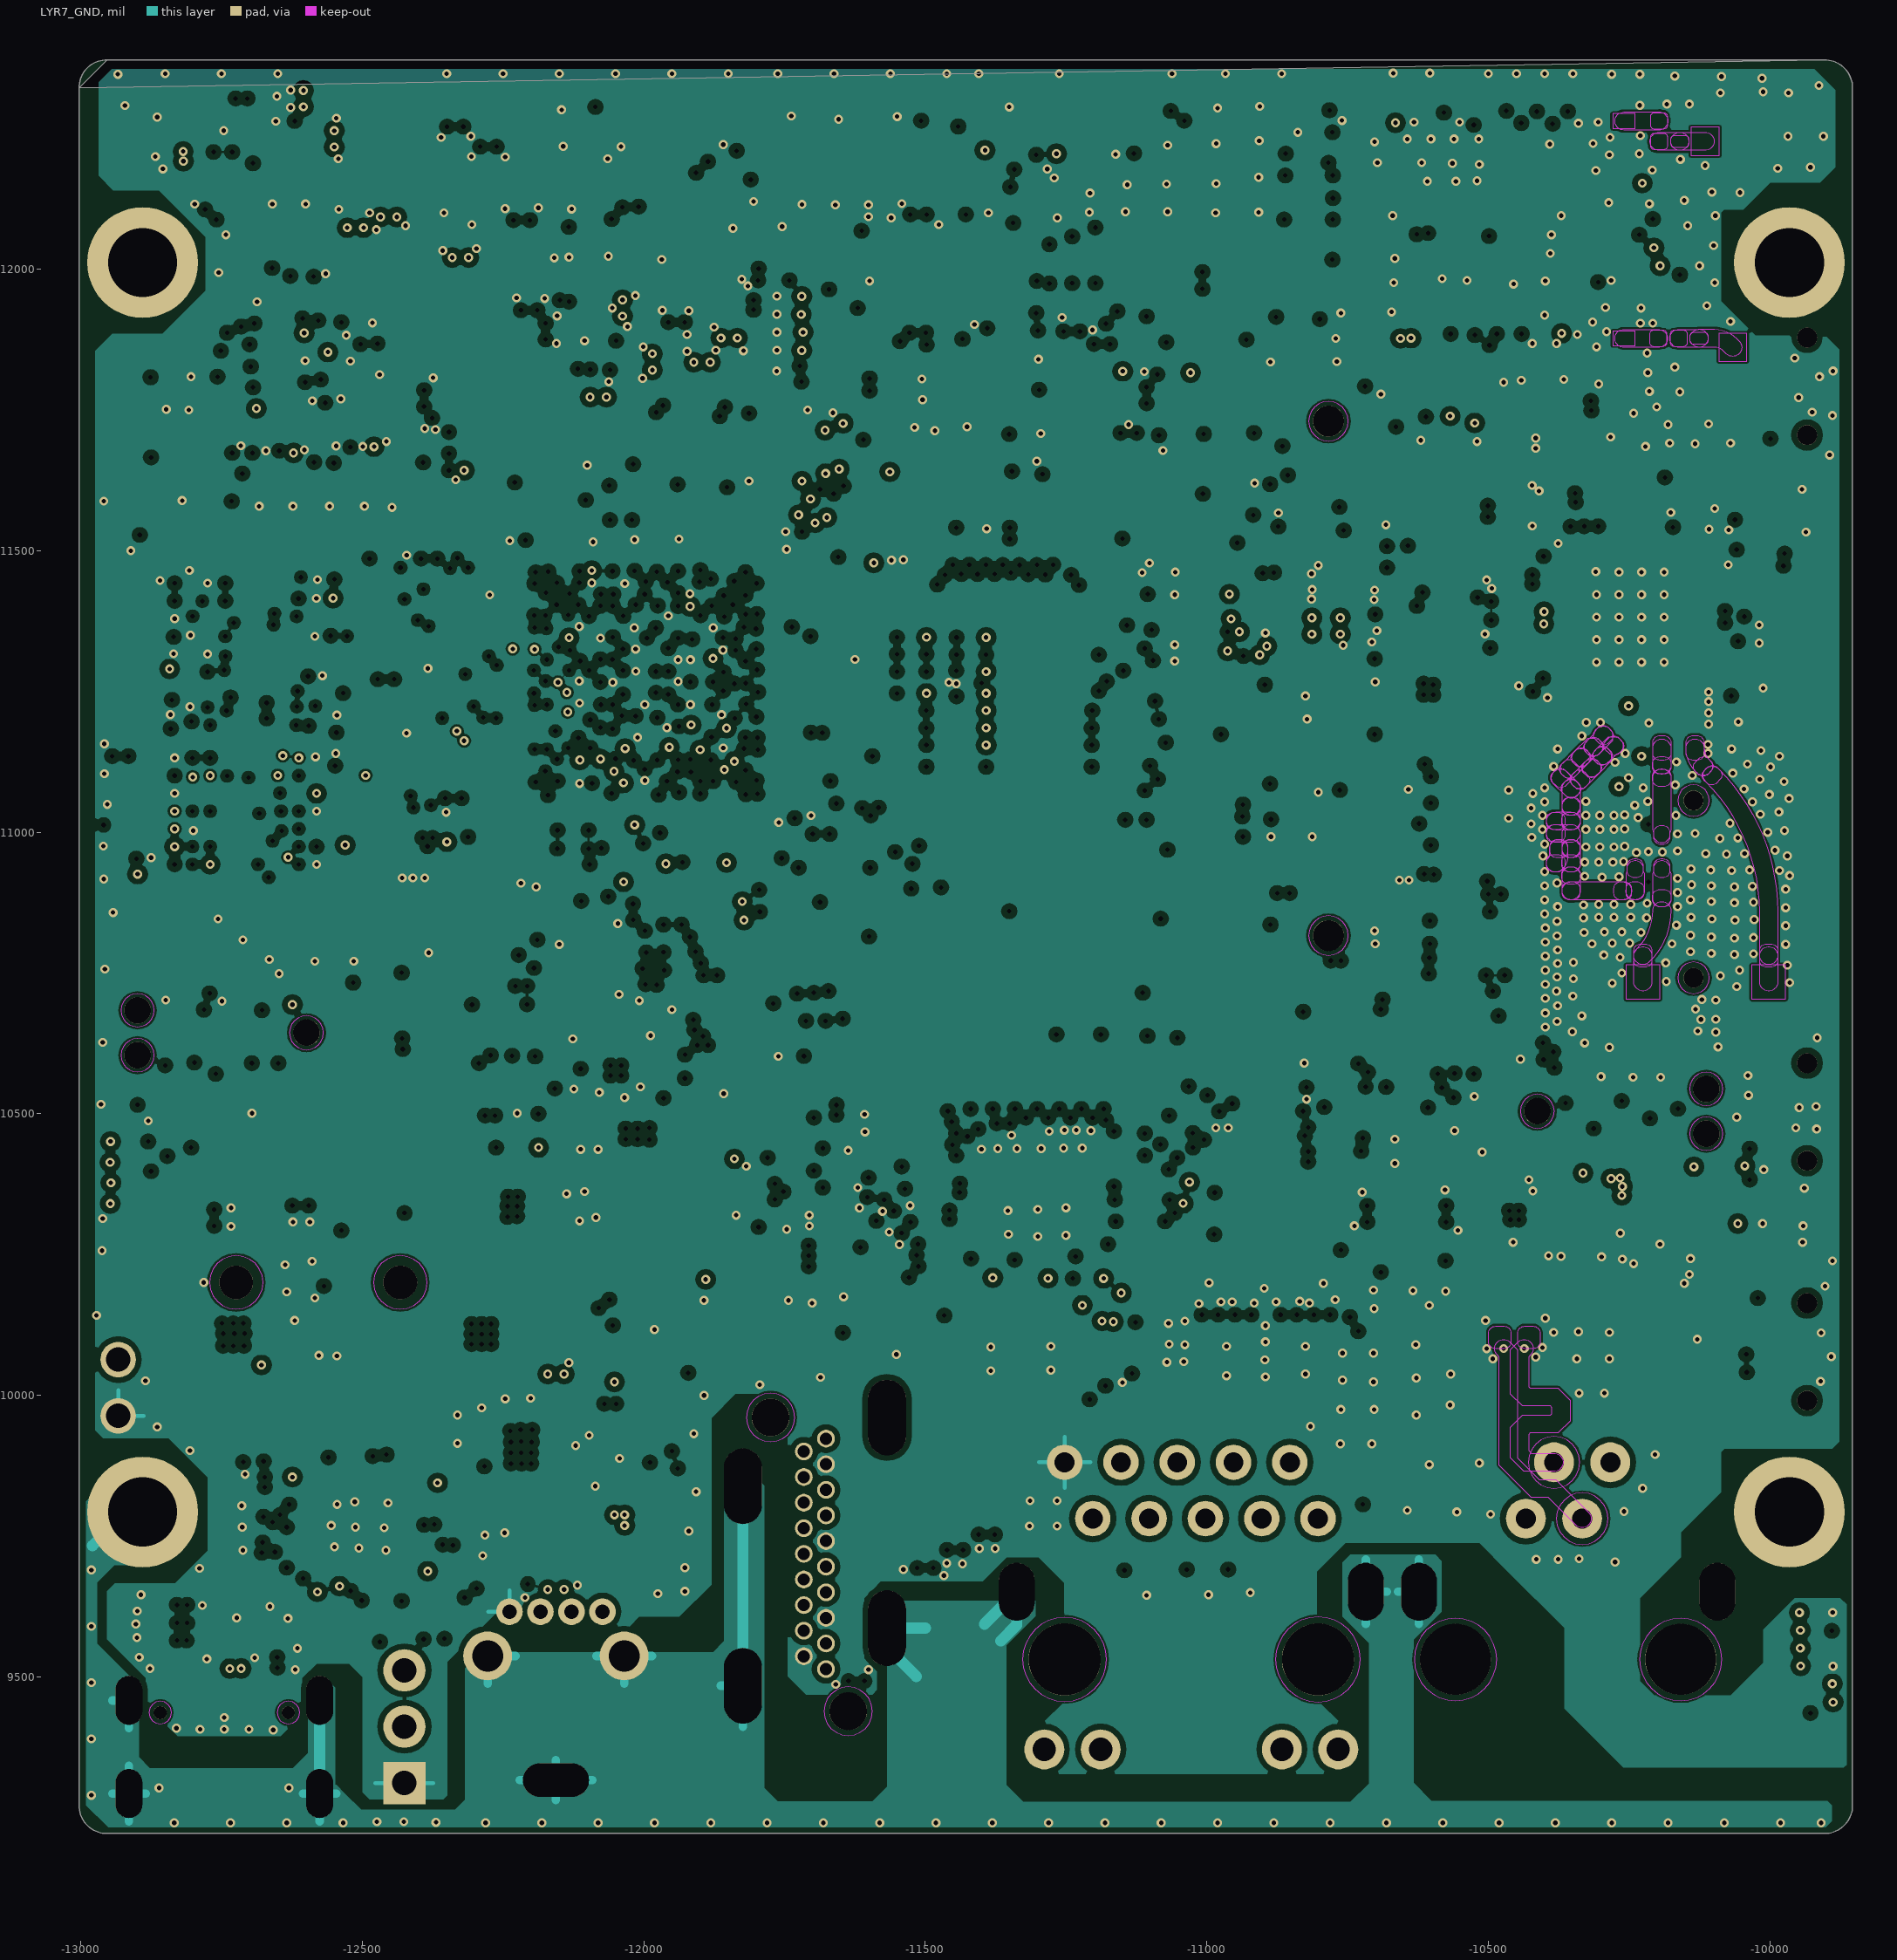
[diagram p7: LYR7_GND]

## Layer stack, top to bottom
Top Solder: solder mask 0.4, Solder Resist, Dk 3.5
TOP: signal copper 1.4
Dielectric 1: core 3, FR-4, Dk 4.2
LYR2_GND: signal copper 1.4
Dielectric2: core 3, FR-4, Dk 4.2
LYR3: signal copper 0.7
Dielectric3: core 17.72, FR-4, Dk 4.2
LAY4_PWR1: signal copper 1.2
Dielectric4: core 4, FR-4, Dk 4.2
LAY5_PWR2: signal copper 1.2
Dielectric5: core 17.72, FR-4, Dk 4.2
LAY6: signal copper 0.7
Dielectric6: core 3, FR-4, Dk 4.2
LYR7_GND: signal copper 1.4
Dielectric7: core 3, FR-4, Dk 4.2
BOTTOM: signal copper 1.4
Bottom Solder: solder mask 0.4, Solder Resist, Dk 3.5

## Board outline
-9903.3,12371.7 -12953,12371.7 ccw(c-12953,12321.7) -12953,12371.7 -9903.3,12371.7 cw(c-9903.3,12321.7) -9853.3,12321.7 -9853.3,9272 cw(c-9903.3,9272) -9903.3,9222 -12953,9222 cw(c-12953,9272) -13003,9272 -13003,12321.7

## Design rules (kind name [scope] priority, off if disabled: settings)
Clearance "Clearance for 9 On Layer LYR7_GND" [OnLayer('LYR7_GND') And (InNetClass('DDR_ADDR') Or InNetClass('DDR_DATA')) vs IsArc Or IsTrack Or IsPad Or IsThruPin Or IsThruVia Or IsFill Or InPolygon Or IsRegion] p1: gap=10 ignorepadtopadclearanceinfootprint=FALSE except(0: Arc-Hole Track-Hole SMDPad-Hole THPad-Hole Via-Hole Fill-Hole Poly-Hole Region-Hole Text-Hole; 4: Arc-SMDPad Track-SMDPad)
Clearance "Clearance for 9 On Layer LAY6" [OnLayer('LAY6') And (InNetClass('DDR_ADDR') Or InNetClass('DDR_DATA')) vs IsArc Or IsTrack Or IsPad Or IsThruPin Or IsThruVia Or IsFill Or InPolygon Or IsRegion] p2: gap=10 ignorepadtopadclearanceinfootprint=FALSE except(0: Arc-Hole Track-Hole SMDPad-Hole THPad-Hole Via-Hole Fill-Hole Poly-Hole Region-Hole Text-Hole; 5: Arc-SMDPad Track-SMDPad)
Clearance "Clearance for 9 On Layer LAY5_PWR2" [OnLayer('LAY5_PWR2') And (InNetClass('DDR_ADDR') Or InNetClass('DDR_DATA')) vs IsArc Or IsTrack Or IsPad Or IsThruPin Or IsThruVia Or IsFill Or InPolygon Or IsRegion] p3: gap=10 ignorepadtopadclearanceinfootprint=FALSE except(0: Arc-Hole Track-Hole SMDPad-Hole THPad-Hole Via-Hole Fill-Hole Poly-Hole Region-Hole Text-Hole; 5: Arc-SMDPad Track-SMDPad)
Clearance "Clearance for 9 On Layer LAY4_PWR1" [OnLayer('LAY4_PWR1') And (InNetClass('DDR_ADDR') Or InNetClass('DDR_DATA')) vs IsArc Or IsTrack Or IsPad Or IsThruPin Or IsThruVia Or IsFill Or InPolygon Or IsRegion] p4: gap=10 ignorepadtopadclearanceinfootprint=FALSE except(0: Arc-Hole Track-Hole SMDPad-Hole THPad-Hole Via-Hole Fill-Hole Poly-Hole Region-Hole Text-Hole; 5: Arc-SMDPad Track-SMDPad)
Clearance "Clearance for 9 On Layer LYR3" [OnLayer('LYR3') And (InNetClass('DDR_ADDR') Or InNetClass('DDR_DATA')) vs IsArc Or IsTrack Or IsPad Or IsThruPin Or IsThruVia Or IsFill Or InPolygon Or IsRegion] p5: gap=10 ignorepadtopadclearanceinfootprint=FALSE except(0: Arc-Hole Track-Hole SMDPad-Hole THPad-Hole Via-Hole Fill-Hole Poly-Hole Region-Hole Text-Hole; 5: Arc-SMDPad Track-SMDPad)
Clearance "Clearance for 9 On Layer LYR2_GND" [OnLayer('LYR2_GND') And (InNetClass('DDR_ADDR') Or InNetClass('DDR_DATA')) vs IsArc Or IsTrack Or IsPad Or IsThruPin Or IsThruVia Or IsFill Or InPolygon Or IsRegion] p6: gap=10 ignorepadtopadclearanceinfootprint=FALSE except(0: Arc-Hole Track-Hole SMDPad-Hole THPad-Hole Via-Hole Fill-Hole Poly-Hole Region-Hole Text-Hole; 5: Arc-SMDPad Track-SMDPad)
Clearance "Clearance for 9 On Layer BOTTOM" [OnLayer('BOTTOM') And (InNetClass('DDR_ADDR') Or InNetClass('DDR_DATA')) vs IsArc Or IsTrack Or IsPad Or IsThruPin Or IsThruVia Or IsFill Or InPolygon Or IsRegion] p7: gap=10 ignorepadtopadclearanceinfootprint=FALSE except(0: Arc-Hole Track-Hole SMDPad-Hole THPad-Hole Via-Hole Fill-Hole Poly-Hole Region-Hole Text-Hole; 5: Arc-SMDPad Track-SMDPad)
Clearance "Clearance for 9 On Layer TOP" [OnLayer('TOP') And (InNetClass('DDR_ADDR') Or InNetClass('DDR_DATA')) vs IsArc Or IsTrack Or IsPad Or IsThruPin Or IsThruVia Or IsFill Or InPolygon Or IsRegion] p8: gap=10 ignorepadtopadclearanceinfootprint=FALSE except(0: Arc-Hole Track-Hole SMDPad-Hole THPad-Hole Via-Hole Fill-Hole Poly-Hole Region-Hole Text-Hole; 5: Arc-SMDPad Track-SMDPad)
Clearance "Clearance for 9" [InNetClass('DDR_ADDR') Or InNetClass('DDR_DATA') vs IsArc Or IsTrack Or IsPad Or IsThruPin Or IsThruVia Or IsFill Or InPolygon Or IsRegion] p9: gap=10 ignorepadtopadclearanceinfootprint=FALSE except(0: Text-Hole; 3.5: Arc-Via Track-Via; 4: SMDPad-SMDPad SMDPad-THPad SMDPad-Via SMDPad-Fill SMDPad-Poly SMDPad-Region THPad-THPad THPad-Via THPad-Fill THPad-Poly THPad-Region Via-Via Via-Fill Via-Poly Via-Region; 5: Arc-THPad Arc-Fill Arc-Poly Arc-Region Track-THPad Track-Fill Track-Poly Track-Region; 8: Arc-Hole Track-Hole SMDPad-Hole THPad-Hole Via-Hole Fill-Hole Poly-Hole Region-Hole Hole-Hole; 9: Arc-Arc Arc-Track Track-Track)
Clearance "Clearance for DEFAULT On Layer LYR7_GND" [OnLayer('LYR7_GND') And (InNetClass('CLK')) vs IsArc Or IsTrack Or IsPad Or IsThruPin Or IsThruVia Or IsFill Or InPolygon Or IsRegion] p10: gap=10 ignorepadtopadclearanceinfootprint=FALSE except(0: Arc-Hole Track-Hole SMDPad-Hole THPad-Hole Via-Hole Fill-Hole Poly-Hole Region-Hole Text-Hole; 4.5: Arc-THPad Track-THPad)
Clearance "Clearance for DEFAULT On Layer LAY6" [OnLayer('LAY6') And (InNetClass('CLK')) vs IsArc Or IsTrack Or IsPad Or IsThruPin Or IsThruVia Or IsFill Or InPolygon Or IsRegion] p11: gap=10 ignorepadtopadclearanceinfootprint=FALSE except(0: Arc-Hole Track-Hole SMDPad-Hole THPad-Hole Via-Hole Fill-Hole Poly-Hole Region-Hole Text-Hole; 5: Arc-THPad Track-THPad)
Clearance "Clearance for DEFAULT On Layer LAY5_PWR2" [OnLayer('LAY5_PWR2') And (InNetClass('CLK')) vs IsArc Or IsTrack Or IsPad Or IsThruPin Or IsThruVia Or IsFill Or InPolygon Or IsRegion] p12: gap=10 ignorepadtopadclearanceinfootprint=FALSE except(0: Arc-Hole Track-Hole SMDPad-Hole THPad-Hole Via-Hole Fill-Hole Poly-Hole Region-Hole Text-Hole; 5: Arc-THPad Track-THPad)
Clearance "Clearance for DEFAULT On Layer LAY4_PWR1" [OnLayer('LAY4_PWR1') And (InNetClass('CLK')) vs IsArc Or IsTrack Or IsPad Or IsThruPin Or IsThruVia Or IsFill Or InPolygon Or IsRegion] p13: gap=10 ignorepadtopadclearanceinfootprint=FALSE except(0: Arc-Hole Track-Hole SMDPad-Hole THPad-Hole Via-Hole Fill-Hole Poly-Hole Region-Hole Text-Hole; 5: Arc-THPad Track-THPad)
Clearance "Clearance for DEFAULT On Layer LYR3" [OnLayer('LYR3') And (InNetClass('CLK')) vs IsArc Or IsTrack Or IsPad Or IsThruPin Or IsThruVia Or IsFill Or InPolygon Or IsRegion] p14: gap=10 ignorepadtopadclearanceinfootprint=FALSE except(0: Arc-Hole Track-Hole SMDPad-Hole THPad-Hole Via-Hole Fill-Hole Poly-Hole Region-Hole Text-Hole; 5: Arc-THPad Track-THPad)
Clearance "Clearance for DEFAULT On Layer LYR2_GND" [OnLayer('LYR2_GND') And (InNetClass('CLK')) vs IsArc Or IsTrack Or IsPad Or IsThruPin Or IsThruVia Or IsFill Or InPolygon Or IsRegion] p15: gap=10 ignorepadtopadclearanceinfootprint=FALSE except(0: Arc-Hole Track-Hole SMDPad-Hole THPad-Hole Via-Hole Fill-Hole Poly-Hole Region-Hole Text-Hole; 5: Arc-THPad Track-THPad)
Clearance "Clearance for DEFAULT On Layer BOTTOM" [OnLayer('BOTTOM') And (InNetClass('CLK')) vs IsArc Or IsTrack Or IsPad Or IsThruPin Or IsThruVia Or IsFill Or InPolygon Or IsRegion] p16: gap=10 ignorepadtopadclearanceinfootprint=FALSE except(0: Arc-Hole Track-Hole SMDPad-Hole THPad-Hole Via-Hole Fill-Hole Poly-Hole Region-Hole Text-Hole; 5: Arc-THPad Track-THPad)
Clearance "Clearance for DEFAULT On Layer TOP" [OnLayer('TOP') And (InNetClass('CLK')) vs IsArc Or IsTrack Or IsPad Or IsThruPin Or IsThruVia Or IsFill Or InPolygon Or IsRegion] p17: gap=10 ignorepadtopadclearanceinfootprint=FALSE except(0: Arc-Hole Track-Hole SMDPad-Hole THPad-Hole Via-Hole Fill-Hole Poly-Hole Region-Hole Text-Hole; 5: Arc-THPad Track-THPad)
Clearance "Clearance for DEFAULT" [InNetClass('CLK') vs IsArc Or IsTrack Or IsPad Or IsThruPin Or IsThruVia Or IsFill Or InPolygon Or IsRegion] p18: gap=10 ignorepadtopadclearanceinfootprint=FALSE except(0: Text-Hole; 4: Arc-Arc Arc-Track Track-Track SMDPad-SMDPad SMDPad-THPad SMDPad-Via SMDPad-Fill SMDPad-Poly SMDPad-Region THPad-THPad THPad-Via THPad-Fill THPad-Poly THPad-Region Via-Via Via-Fill Via-Poly Via-Region; 5: Arc-SMDPad Track-SMDPad; 8: Arc-Hole Track-Hole SMDPad-Hole THPad-Hole Via-Hole Fill-Hole Poly-Hole Region-Hole Hole-Hole)
Clearance "Clearance (Same Net) On Layer LYR7_GND" [OnLayer('LYR7_GND')] p19: gap=10 ignorepadtopadclearanceinfootprint=FALSE except(0: Arc-Hole Track-Hole SMDPad-Hole THPad-Hole Via-Hole Fill-Hole Poly-Hole Region-Hole Text-Hole; 4: Fill-Poly Fill-Region Poly-Region)
Clearance "Clearance (Same Net) On Layer LAY6" [OnLayer('LAY6')] p20: gap=10 ignorepadtopadclearanceinfootprint=FALSE except(0: Arc-Hole Track-Hole SMDPad-Hole THPad-Hole Via-Hole Fill-Hole Poly-Hole Region-Hole Text-Hole)
Clearance "Clearance (Same Net) On Layer LAY5_PWR2" [OnLayer('LAY5_PWR2')] p21: gap=10 ignorepadtopadclearanceinfootprint=FALSE except(0: Arc-Hole Track-Hole SMDPad-Hole THPad-Hole Via-Hole Fill-Hole Poly-Hole Region-Hole Text-Hole; 4: Fill-Poly Fill-Region Poly-Region)
Clearance "Clearance (Same Net) On Layer LAY4_PWR1" [OnLayer('LAY4_PWR1')] p22: gap=10 ignorepadtopadclearanceinfootprint=FALSE except(0: Arc-Hole Track-Hole SMDPad-Hole THPad-Hole Via-Hole Fill-Hole Poly-Hole Region-Hole Text-Hole)
Clearance "Clearance (Same Net) On Layer LYR3" [OnLayer('LYR3')] p23: gap=10 ignorepadtopadclearanceinfootprint=FALSE except(0: Arc-Hole Track-Hole SMDPad-Hole THPad-Hole Via-Hole Fill-Hole Poly-Hole Region-Hole Text-Hole)
Clearance "Clearance (Same Net) On Layer LYR2_GND" [OnLayer('LYR2_GND')] p24: gap=10 ignorepadtopadclearanceinfootprint=FALSE except(0: Arc-Hole Track-Hole SMDPad-Hole THPad-Hole Via-Hole Fill-Hole Poly-Hole Region-Hole Text-Hole; 4: Fill-Poly Fill-Region Poly-Region)
Clearance "Clearance (Same Net) On Layer BOTTOM" [OnLayer('BOTTOM')] p25: gap=10 ignorepadtopadclearanceinfootprint=FALSE except(0: Arc-Hole Track-Hole SMDPad-Hole THPad-Hole Via-Hole Fill-Hole Poly-Hole Region-Hole Text-Hole)
Clearance "Clearance (Same Net) On Layer TOP" [OnLayer('TOP')] p26: gap=10 ignorepadtopadclearanceinfootprint=FALSE except(0: Arc-Hole Track-Hole SMDPad-Hole THPad-Hole Via-Hole Fill-Hole Poly-Hole Region-Hole Text-Hole; 4: Fill-Poly Fill-Region Poly-Region)
Clearance "Clearance (Same Net)" [All] p27: gap=4 ignorepadtopadclearanceinfootprint=FALSE except(0: Text-Hole; 3.5: Arc-Via Track-Via; 5: Arc-SMDPad Arc-THPad Arc-Fill Arc-Poly Arc-Region Arc-Hole Track-SMDPad Track-THPad Track-Fill Track-Poly Track-Region Track-Hole SMDPad-Hole THPad-Hole Via-Hole Hole-Hole; 10: Arc-Text Track-Text SMDPad-Text THPad-Text Via-Text Fill-Fill Fill-Poly Fill-Region Fill-Text Poly-Poly Poly-Region Poly-Text Region-Region Region-Text Text-Text)
Clearance "Clearance On Layer LYR7_GND" [OnLayer('LYR7_GND')] p28: gap=10 ignorepadtopadclearanceinfootprint=FALSE except(0: Arc-Hole Track-Hole SMDPad-Hole THPad-Hole Via-Hole Fill-Hole Poly-Hole Region-Hole Text-Hole; 4.5: Arc-THPad Track-THPad)
Clearance "Clearance On Layer LAY6" [OnLayer('LAY6')] p29: gap=10 ignorepadtopadclearanceinfootprint=FALSE except(0: Arc-Hole Track-Hole SMDPad-Hole THPad-Hole Via-Hole Fill-Hole Poly-Hole Region-Hole Text-Hole; 5: Arc-THPad Track-THPad)
Clearance "Clearance On Layer LAY5_PWR2" [OnLayer('LAY5_PWR2')] p30: gap=10 ignorepadtopadclearanceinfootprint=FALSE except(0: Arc-Hole Track-Hole SMDPad-Hole THPad-Hole Via-Hole Fill-Hole Poly-Hole Region-Hole Text-Hole; 5: Arc-THPad Track-THPad)
Clearance "Clearance On Layer LAY4_PWR1" [OnLayer('LAY4_PWR1')] p31: gap=10 ignorepadtopadclearanceinfootprint=FALSE except(0: Arc-Hole Track-Hole SMDPad-Hole THPad-Hole Via-Hole Fill-Hole Poly-Hole Region-Hole Text-Hole; 5: Arc-THPad Track-THPad)
Clearance "Clearance On Layer LYR3" [OnLayer('LYR3')] p32: gap=10 ignorepadtopadclearanceinfootprint=FALSE except(0: Arc-Hole Track-Hole SMDPad-Hole THPad-Hole Via-Hole Fill-Hole Poly-Hole Region-Hole Text-Hole; 5: Arc-THPad Track-THPad)
Clearance "Clearance On Layer LYR2_GND" [OnLayer('LYR2_GND')] p33: gap=10 ignorepadtopadclearanceinfootprint=FALSE except(0: Arc-Hole Track-Hole SMDPad-Hole THPad-Hole Via-Hole Fill-Hole Poly-Hole Region-Hole Text-Hole; 5: Arc-THPad Track-THPad)
Clearance "Clearance On Layer BOTTOM" [OnLayer('BOTTOM')] p34: gap=10 ignorepadtopadclearanceinfootprint=FALSE except(0: Arc-Hole Track-Hole SMDPad-Hole THPad-Hole Via-Hole Fill-Hole Poly-Hole Region-Hole Text-Hole; 5: Arc-THPad Track-THPad)
Clearance "Clearance On Layer TOP" [OnLayer('TOP')] p35: gap=10 ignorepadtopadclearanceinfootprint=FALSE except(0: Arc-Hole Track-Hole SMDPad-Hole THPad-Hole Via-Hole Fill-Hole Poly-Hole Region-Hole Text-Hole; 5: Arc-THPad Track-THPad)
Clearance [All] p36: gap=10 ignorepadtopadclearanceinfootprint=FALSE except(0: Text-Hole; 4: Arc-Arc Arc-Track Track-Track SMDPad-SMDPad SMDPad-THPad SMDPad-Via SMDPad-Fill SMDPad-Poly SMDPad-Region THPad-THPad THPad-Via THPad-Fill THPad-Poly THPad-Region Via-Via Via-Fill Via-Poly Via-Region; 5: Arc-SMDPad Track-SMDPad; 8: Arc-Hole Track-Hole SMDPad-Hole THPad-Hole Via-Hole Fill-Hole Poly-Hole Region-Hole Hole-Hole)
DiffPairsRouting [All] p1: maxlimit=10 minlimit=10 mostfreqgap=10 toplayer_minwidth=15 toplayer_maxwidth=15 toplayer_prefwidth=15 midlayer1_minwidth=15 midlayer1_maxwidth=15 midlayer1_prefwidth=15 midlayer2_minwidth=15 midlayer2_maxwidth=15 midlayer2_prefwidth=15 midlayer3_minwidth=15 midlayer3_maxwidth=15 midlayer3_prefwidth=15 midlayer4_minwidth=15 midlayer4_maxwidth=15 midlayer4_prefwidth=15 midlayer5_minwidth=15 midlayer5_maxwidth=15 midlayer5_prefwidth=15 midlayer6_minwidth=15 midlayer6_maxwidth=15 midlayer6_prefwidth=15 bottomlayer_minwidth=15 bottomlayer_maxwidth=15 bottomlayer_prefwidth=15 maxuncoupledlength=500
PlaneConnect [All] p1: planeconnectstyle=Direct reliefexpansion=20 reliefentries=4 reliefconductorwidth=10 reliefairgap=10
PolygonConnect [All] p1: connectstyle=Direct reliefconductorwidth=10 reliefentries=4 polygonreliefangle="90 Angle" airgapwidth=10
RoutingVias [All] p1: holewidth=28 width=50 viastyle="Through Hole" minholewidth=28 minwidth=50 maxholewidth=28 maxwidth=50
SolderMaskExpansion [All] p1: expansion=4 istentingtop=FALSE
Width [All] p1: maxlimit=10 minlimit=10 preferedwidth=10 impedanceprofiledriven=TRUE minimp=5.690000 maximp=36.140000 favimp=3.860000
28 further rules are at their usual default settings.

## Classes and differential pairs
net class CLS_SD: SD_CMD SD_D0 SD_D1 SD_D2 SD_D3
net class POWER: GND HDMI_AVCC PWR_BTN VOUT0_D3 VOUT0_D4 VOUT0_D9 VOUT0_D10 VOUT0_D14 VOUT0_D15
net class DDR_DATA: DDR_DQ0 DDR_DQ1 DDR_DQ2 DDR_DQ3 DDR_DQ4 DDR_DQ5 DDR_DQ6 DDR_DQ7 DDR_DQ8 DDR_DQ9 DDR_DQ10 DDR_DQ11 DDR_DQ12 DDR_DQ13 DDR_DQ14 DDR_DQ15 DDR_LDM DDR_UDM
net class DDR_ADDR: DDR_A0 DDR_A1 DDR_A2 DDR_A3 DDR_A4 DDR_A5 DDR_A6 DDR_A7 DDR_A8 DDR_A9 DDR_A10 DDR_A11 DDR_A12 DDR_A13 DDR_A14_WEN DDR_A15_CAS DDR_A16_RAS DDR_ACTN DDR_ALERTN DDR_BA0 DDR_BA1 DDR_BG0 DDR_CKE DDR_CSN DDR_ODT DDR_PARITY DDR_RESET# DDR_TEN
differential pair USB1_DP: +USB1_DM -USB1_DP
differential pair USB0_DP: +USB0_DM -USB0_DP
differential pair USB_C_DP: +USB_C_DM -USB_C_DP
differential pair USB_A_DP: +USB_A_DM -USB_A_DP
differential pair DP_RX: +TX_N -TX_P
differential pair DP_RX: +RX_P -TX_N
differential pair DP_RX: +RX_N -RX_P
differential pair PSE_P: +PSE_N -PSE_P
differential pair OLDI0_CLK1: +OLDI0_CLK1_N -OLDI0_CLK1_P
differential pair OLDI0_CLK0: +OLDI0_CLK0_N -OLDI0_CLK0_P
differential pair OLDI0_A4: +OLDI0_A4_N -OLDI0_A4_P
differential pair E_LVDS_0_P: +OLDI0_A3_N -OLDI0_A3_P
differential pair OLDI0_A2: +OLDI0_A2_N -OLDI0_A2_P
differential pair OLDI0_A1: +OLDI0_A1_N -OLDI0_A1_P
differential pair OLDI0_A0: +OLDI0_A0_N -OLDI0_A0_P
differential pair OLDI0_CLK1: +N17355524 -OLDI0_CLK1_N
differential pair OLDI0_CLK1: +N17355497 -N17355524
differential pair OLDI0_CLK0: +N17355388 -OLDI0_CLK0_N
differential pair OLDI0_CLK0: +N17355379 -N17355388
differential pair DP_RX: +N15942332 -RX_N
differential pair DP_RX: +N15942320 -N15942332
differential pair DP_RX: +N15942316 -N15942320
differential pair DP_RX: +N15942312 -N15942316
differential pair DP_RX: +N15942117 -N15942312
differential pair DP_RX: +N15942115 -N15942117
differential pair DP_RX: +N15941883 -N15942115
differential pair DP_RX: +N15941871 -N15941883
differential pair DP_RX: +N15941865 -N15941871
differential pair DP_RX: +N15941863 -N15941865
differential pair MDI3: +MDI3- -MDI3+
differential pair MDI2: +MDI2- -MDI2+
differential pair MDI1: +MDI1- -MDI1+
differential pair MDI0: +MDI0- -MDI0+
differential pair HDMI_TXC: +HDMI_TXC- -HDMI_TXC+
differential pair HDMI_TX2: +HDMI_TX2- -HDMI_TX2+
differential pair HDMI_TX1: +HDMI_TX1- -HDMI_TX1+
differential pair HDMI_TX0: +HDMI_TX0- -HDMI_TX0+
differential pair DDR_UDQS: +DDR_UDQS_N -DDR_UDQS_P
differential pair DDR_LDQS: +DDR_LDQS_N -DDR_LDQS_P
differential pair DDR_CLK: +DDR_CLKN -DDR_CLKP
differential pair CAM_D3_P: +CAM_D3_N -CAM_D3_P
differential pair CAM_D2_P: +CAM_D2_N -CAM_D2_P
differential pair CAM_D1_P: +CAM_D1_N -CAM_D1_P
differential pair CAM_D0_P: +CAM_D0_N -CAM_D0_P
differential pair CAM_CK_P: +CAM_CK_N -CAM_CK_P

## Components (designator, comment, footprint, x,y, rotation, side; value= is the part's Value field where it differs from the comment)
B1 "0900PC15A0036E_BF10_0D5_2X1D25X1MM_DISCRETE_0900PC15A0036E" BF10_0D5_2X1D25X1MM -10162.48,11174.34 r270 bottom
C1 "CC_C0402_DISCRETE_22PF" C0402#1 -10757.14,11226.9 r270 bottom
C2 "CC_C0402_DISCRETE_22PF" C0402#2 -10885.08,11219.14 r180 bottom
C3 "CC_C0201_DISCRETE_10NF" C0201#1 -10737.8,11402.66 r0 bottom
C4 "CC_C0201_DISCRETE_100NF" C0201#1 -10737.8,11429.14 r0 bottom
C5 "CC_C0402_DISCRETE_1UF" C0402#1 -10733.34,11353.28 r90 bottom
C6 "CC_C0201_DISCRETE_10NF" C0201#1 -11032,11290 r180 bottom
C7 "CC_C0201_DISCRETE_100NF" C0201#1 -11032,11317 r180 bottom
C8 "CC_C0402_DISCRETE_1UF" C0402#2 -11038,11257 r180 bottom
C9 "CC_C0201_DISCRETE_10NF" C0201#1 -10737.8,11480.66 r0 bottom
C10 "CC_C0201_DISCRETE_100NF" C0201#1 -10737.8,11454.95 r0 bottom
C11 "CC_C0402_DISCRETE_1UF" C0402#1 -10742.66,11540 r270 bottom
C12 "CC_C0402_DISCRETE_220NF" C0402#3 -10755.14,10457.76 r270 top
C13 "CC_C0402_DISCRETE_220NF" C0402#3 -10792.14,10457.76 r270 top
C14 "CC_C0402_DISCRETE_4.7NF" C0402#3 -10644.14,10457.76 r270 top
C15 "CC_C0402_DISCRETE_4.7NF" C0402#3 -10607.14,10457.76 r270 top
C16 "CC_C0402_DISCRETE_100PF_" C0402#1 -10479.67,10121.14 r270 bottom
C17 "CC_C0402_DISCRETE_100PF" C0402#1 -10428.01,10121.14 r270 bottom
C18 "CC_C0201_DISCRETE_100PF" C0201#2 -10228.64,11108.05 r90 bottom
C19 "CC_C0201_DISCRETE_100PF" C0201#2 -10192.01,11107.73 r90 bottom
C20 "CC_C0201_DISCRETE_100NF" C0201#2 -10049,11596.8 r270 bottom
C21 "CC_C0201_DISCRETE_100PF" C0201#2 -10192.01,10872 r90 bottom
C22 "CC_C0201_DISCRETE_100PF" C0201#2 -10267.57,11056.46 r90 bottom
C23 "CC_C0201_DISCRETE_10NF" C0201#2 -10294.52,11056.27 r90 bottom
C24 "CC_C0603_DISCRETE_22UF" C0603#1 -10399.3,11589.7 r180 bottom
C25 "CC_C0201_DISCRETE_100PF" C0201#1 -10250.57,10896 r180 bottom
C26 "CC_C0201_DISCRETE_2.4PF" C0201#3 -10345.31,11085.46 r135 bottom
C27 "CC_C0201_DISCRETE_0.8PF" C0201#2 -10353.09,11009 r90 bottom
C28 "CC_C0201_DISCRETE_3PF" C0201#1 -10364.09,10970.99 r180 bottom
C29 "CC_C0201_DISCRETE_4.7PF" C0201#1 -10364.09,10896 r180 bottom
C30 "CC_C0201_DISCRETE_2.4PF" C0201#4 -10343.22,11140.47 r225 bottom
C31 "CC_C0201_DISCRETE_3.9PF" C0201#1 -10364.09,11046.04 r180 bottom
C32 "CC_C0402_DISCRETE_1UF" C0402#2 -10424.26,11522.72 r180 bottom
C33 "CC_C0402_DISCRETE_12PF" C0402#1 -10409.64,11129.58 r90 bottom
C34 "CC_C0402_DISCRETE_12PF" C0402#1 -10409.96,11201.86 r270 bottom
C35 "CC_C0402_DISCRETE_6.2PF" C0402#2 -9971.62,11182.36 r0 bottom
C36 "CC_C0402_DISCRETE_6.2PF" C0402#2 -9971.62,11334.36 r0 bottom
C37 "CC_C0603_DISCRETE_22UF" C0603#1 -10480.3,11472.7 r180 bottom
C38 "CC_C0201_DISCRETE_100NF" C0201#1 -10454.26,11430.56 r180 bottom
C39 "CC_C0201_DISCRETE_100NF" C0201#1 -10437.12,11273.56 r180 bottom
C40 "CC_C0201_DISCRETE_100NF" C0201#1 -10034.56,11364.84 r0 bottom
C41 "CC_C0201_DISCRETE_100NF" C0201#1 -10165.12,11560 r180 bottom
C42 "CC_C0201_DISCRETE_100NF" C0201#1 -10034.32,11339.36 r0 bottom
C43 "CC_C0201_DISCRETE_100NF" C0201#2 -10068.64,11219.4 r90 bottom
C44 "CC_C0603_DISCRETE_10UF" C0603#1 -12883,9580 r180 bottom
C45 "CC_C0201_DISCRETE_12PF" C0201#4 -10110.54,11109.12 r45 bottom
C46 "CC_C0402_DISCRETE_2.2UF" C0402#2 -12692.64,9821.34 r180 bottom
C47 "CC_C0402_DISCRETE_2.2UF" C0402#2 -12693.68,9784.34 r180 bottom
C48 "CC_C0402_DISCRETE_2.2UF" C0402#2 -12693.72,9747.34 r180 bottom
C49 "CC_C0402_DISCRETE_2.2UF" C0402#3 -12421.76,9687.66 r180 top
C50 "CC_C0805_DISCRETE_47UF" C0805#1 -12260.62,9935.34 r180 bottom
C51 "CC_C0805_DISCRETE_22UF" C0805#1 -10763.56,10721.8 r0 bottom
C52 "CC_C0402_DISCRETE_2.2UF" C0402#3 -12549.34,9712.8 r90 top
C53 "CC_C0402_DISCRETE_2.2UF" C0402#3 -12512.34,9712.84 r90 top
C54 "CC_C0805_DISCRETE_47UF" C0805#1 -12643,10092 r0 bottom
C55 "CC_C0201_DISCRETE_100NF" C0201#5 -12001.5,10124.34 r0 top
C56 "CC_C0201_DISCRETE_100NF" C0201#1 -10994.6,10888.36 r0 bottom
C57 "CC_C0805_DISCRETE_22UF" C0805#2 -10609.2,10655.56 r90 bottom
C58 "CC_C0201_DISCRETE_100NF" C0201#5 -12527.66,11400.2 r270 top
C59 "CC_C0201_DISCRETE_100NF" C0201#5 -12863,10966 r270 top
C60 "CC_C0805_DISCRETE_47UF" C0805#2 -12289,10044 r90 bottom
C61 "CC_C0201_DISCRETE_100NF" C0201#5 -11183.88,10344.48 r180 top
C62 "CC_C0603_DISCRETE_10UF" C0603#2 -12415.34,9811.5 r90 top
C63 "CC_C0603_DISCRETE_10UF" C0603#2 -12483.66,9837.5 r270 top
C64 "CC_C0603_DISCRETE_10UF" C0603#2 -12544.66,9836.5 r270 top
C65 "CC_C0201_DISCRETE_100NF" C0201#5 -12523.86,11868.36 r180 top
C66 "CC_C0201_DISCRETE_100NF" C0201#5 -12484.66,11840.88 r270 top
C67 "CC_C0201_DISCRETE_100NF" C0201#5 -12601.34,11817.18 r90 top
C68 "CC_C0201_DISCRETE_100NF" C0201#5 -12554.56,11804.04 r0 top
C69 "CC_C0402_DISCRETE_4.7UF" C0402#3 -12452.66,11853.2 r270 top
C70 "CC_C0201_DISCRETE_100NF" C0201#5 -12627.66,11972.34 r270 top
C71 "CC_C0201_DISCRETE_100NF" C0201#5 -12654.66,11972.38 r270 top
C72 "CC_C0201_DISCRETE_100NF" C0201#5 -12601,11972.34 r270 top
C73 "CC_C0201_DISCRETE_100NF" C0201#5 -12554.72,11777.04 r0 top
C74 "CC_C0201_DISCRETE_100NF" C0201#5 -12640.2,11936.36 r180 top
C75 "CC_C0402_DISCRETE_4.7UF" C0402#3 -12686.66,11960.2 r270 top
C76 "CC_C0201_DISCRETE_100NF" C0201#5 -12643.84,11754.04 r0 top
C77 "CC_C0402_DISCRETE_4.7UF" C0402#3 -10637,10890.21 r180 top
C78 "CC_C0201_DISCRETE_100NF" C0201#5 -10628.94,10946.36 r180 top
C79 "CC_C0201_DISCRETE_100NF" C0201#5 -10629.18,10921.36 r180 top
C80 "CC_C0402_DISCRETE_2.2UF" C0402#3 -12917.88,10975.36 r180 top
C81 "CC_C0201_DISCRETE_100NF" C0201#5 -12860.34,11354.2 r90 top
C82 "CC_C0201_DISCRETE_10NF" C0201#5 -12798.7,11187 r90 top
C83 "CC_C0603_DISCRETE_10UF" C0603#2 -10654.2,11947.5 r180 top
C84 "CC_C0201_DISCRETE_100NF" C0201#5 -10669.14,11901.64 r180 top
C85 "CC_C0201_DISCRETE_100NF" C0201#1 -10415,11755.96 r180 bottom
C86 "CC_C0402_DISCRETE_2.2UF" C0402#2 -10400,11720.64 r180 bottom
C87 "CC_C0201_DISCRETE_100NF" C0201#5 -10249.96,12037.46 r270 top
C88 "CC_C0201_DISCRETE_22PF" C0201#2 -11621.27,12030.62 r90 bottom
C89 "CC_C0201_DISCRETE_22PF" C0201#2 -11423.53,12024.68 r270 bottom
C90 "CC_C0201_DISCRETE_100NF" C0201#2 -11392.01,11590.61 r270 bottom
C91 "CC_C0402_DISCRETE_4.7UF" C0402#3 -11651.79,11845.58 r180 top
C92 "CC_C0201_DISCRETE_100NF" C0201#5 -11642,11811.11 r180 top
C93 "CC_C0201_DISCRETE_1UF" C0201#5 -11585.87,11622.39 r180 top
C94 "CC_C0201_DISCRETE_100NF" C0201#5 -11538.13,11622.61 r0 top
C95 "CC_C0402_DISCRETE_4.7UF" C0402#3 -11689.79,11767.39 r180 top
C96 "CC_C0603_DISCRETE_22UF" C0603#1 -10125,11603 r0 bottom
C99 "CC_C0201_DISCRETE_100NF" C0201#5 -12527.66,11113.4 r90 top
C100 "CC_C0201_DISCRETE_100NF" C0201#5 -12860.34,11196.16 r90 top
C101 "CC_C0201_DISCRETE_100NF" C0201#5 -12915.46,10932.84 r180 top
C102 "CC_C0201_DISCRETE_100NF" C0201#5 -12860.34,11400.24 r270 top
C103 "CC_C0402_DISCRETE_2.2UF" C0402#3 -12323.48,9752.5 r0 top
C104 "CC_C0402_DISCRETE_10UF" C0402#3 -11484.52,10158.68 r180 top
C105 "CC_C1206_DISCRETE_1NF" C1206#1 -12701.34,9367.5 r90 bottom
C107 "CC_C0201_DISCRETE_100NF" C0201#5 -11638.39,11765 r270 top
C108 "CC_C0201_DISCRETE_1UF" C0201#1 -11311.16,11855.09 r0 bottom
C109 "CC_C0603_DISCRETE_22UF" C0603#2 -12912.54,10887.36 r180 top
C110 "CC_C1206_DISCRETE_100UF" C1206#2 -12015,9747.66 r0 top
C111 "CC_C0603_DISCRETE_10UF" C0603#1 -12095.5,9959.34 r180 bottom
C112 "CC_C0402_DISCRETE_2.2UF" C0402#3 -12609.48,9769.34 r0 top
C113 "CC_C0402_DISCRETE_2.2UF" C0402#3 -12323.44,9715.34 r0 top
C114 "CC_C0201_DISCRETE_100NF" C0201#5 -12644.86,11423.32 r90 top
C115 "CC_C0201_DISCRETE_100NF" C0201#5 -12861,11243 r270 top
C116 "CC_C0201_DISCRETE_100NF" C0201#5 -12527.66,11235.5 r270 top
C117 "CC_C0201_DISCRETE_100NF" C0201#5 -12571.66,10956.5 r270 top
C118 "CC_C0201_DISCRETE_100NF" C0201#5 -12835.34,11083.7 r270 top
C119 "CC_C0201_DISCRETE_100NF" C0201#5 -12785,11240.36 r180 top
C120 "CC_C0201_DISCRETE_100NF" C0201#5 -12527.66,11159.4 r270 top
C121 "CC_C0201_DISCRETE_100NF" C0201#1 -12441,10766.7 r180 bottom
C122 "CC_C0201_DISCRETE_100NF" C0201#1 -12440,10869.7 r0 bottom
C123 "CC_C0201_DISCRETE_100NF" C0201#5 -12574.66,11053.44 r270 top
C124 "CC_C0201_DISCRETE_100NF" C0201#1 -12440,10895.7 r0 bottom
C125 "CC_C0402_DISCRETE_2.2UF" C0402#3 -12609.4,9806.34 r0 top
C126 "CC_C0402_DISCRETE_12PF" C0402#2 -12255.96,10912.36 r0 bottom
C127 "CC_C0402_DISCRETE_12PF" C0402#2 -12328.08,10912.04 r180 bottom
C128 "CC_C0402_DISCRETE_10PF" C0402#2 -12135.2,10788.04 r180 bottom
C129 "CC_C0402_DISCRETE_10PF" C0402#2 -12059.76,10787.36 r0 bottom
C130 "CC_C0201_DISCRETE_100NF" C0201#1 -12871,9622 r180 bottom
C131 "CC_C0201_DISCRETE_100NF" C0201#2 -12172.14,9963.06 r270 bottom
C132 "CC_C0402_DISCRETE_10UF" C0402#3 -12021.72,10678.04 r0 top
C133 "CC_C0603_DISCRETE_10UF" C0603#2 -12166.5,10328.34 r0 top
C134 "CC_C0805_DISCRETE_22UF" C0805#1 -12057.7,10418.34 r180 bottom
C135 "CC_C0805_DISCRETE_22UF" C0805#1 -12057.7,10342.34 r180 bottom
C136 "CC_C0201_DISCRETE_1UF" C0201#5 -12078.98,11118.79 r270 top
C137 "CC_C0201_DISCRETE_1UF" C0201#5 -12013.3,11148.04 r0 top
C138 "CC_C0201_DISCRETE_1UF" C0201#5 -11842.66,11160 r270 top
C139 "CC_C0201_DISCRETE_1UF" C0201#5 -11878.3,11148.04 r0 top
C140 "CC_C0201_DISCRETE_1UF" C0201#5 -12114.3,11341.04 r0 top
C141 "CC_C0201_DISCRETE_1UF" C0201#5 -11849.3,11304.01 r0 top
C142 "CC_C0201_DISCRETE_1UF" C0201#5 -11903.34,11413.4 r90 top
C143 "CC_C0201_DISCRETE_1UF" C0201#5 -11890.3,11200.04 r0 top
C144 "CC_C0201_DISCRETE_1UF" C0201#5 -11942.51,11145.87 r0 top
C145 "CC_C0201_DISCRETE_100NF" C0201#5 -12171.62,10915.36 r180 top
C146 "CC_C0201_DISCRETE_10NF" C0201#5 -12106.66,11118.92 r270 top
C147 "CC_C0402_DISCRETE_4.7UF" C0402#3 -12170.7,10882.36 r180 top
C148 "CC_C0201_DISCRETE_100NF" C0201#5 -11859.85,11639.04 r0 top
C149 "CC_C0201_DISCRETE_10NF" C0201#5 -11962.3,11362.41 r0 top
C150 "CC_C0402_DISCRETE_4.7UF" C0402#3 -11851.28,11672.04 r0 top
C151 "CC_C0201_DISCRETE_100NF" C0201#5 -11996.3,11639.04 r0 top
C152 "CC_C0201_DISCRETE_10NF" C0201#5 -12028.66,11371.92 r270 top
C153 "CC_C0402_DISCRETE_4.7UF" C0402#3 -11995.3,11672.04 r0 top
C154 "CC_C0201_DISCRETE_100NF" C0201#5 -11886.85,11109.04 r0 top
C155 "CC_C0201_DISCRETE_100NF" C0201#5 -12238.15,11666.36 r180 top
C156 "CC_C0201_DISCRETE_10NF" C0201#5 -12068.78,11341.36 r180 top
C157 "CC_C0201_DISCRETE_1UF" C0201#5 -12237.7,11639.36 r180 top
C158 "CC_C0201_DISCRETE_100NF" C0201#5 -11637.34,11295.85 r90 top
C159 "CC_C0201_DISCRETE_10NF" C0201#5 -11972.26,11327.36 r180 top
C160 "CC_C0201_DISCRETE_1UF" C0201#5 -11611.34,11295.4 r90 top
C161 "CC_C0201_DISCRETE_100NF" C0201#5 -11521.22,11056.54 r0 top
C162 "CC_C0201_DISCRETE_10NF" C0201#5 -11981.66,11239.88 r270 top
C163 "CC_C0201_DISCRETE_1UF" C0201#5 -11521.22,11030.54 r0 top
C164 "CC_C0201_DISCRETE_100NF" C0201#5 -12181,10694.34 r0 top
C165 "CC_C0201_DISCRETE_10NF" C0201#5 -12054.34,11241.52 r90 top
C166 "CC_C0201_DISCRETE_1UF" C0201#5 -12181,10667.34 r0 top
C167 "CC_C0201_DISCRETE_100NF" C0201#5 -12054.66,11377.55 r270 top
C168 "CC_C0201_DISCRETE_10NF" C0201#5 -12079.66,11377.88 r270 top
C169 "CC_C0201_DISCRETE_1UF" C0201#5 -12144.15,11639.36 r180 top
C170 "CC_C0201_DISCRETE_100NF" C0201#5 -11922.38,11639.04 r0 top
C171 "CC_C0201_DISCRETE_10NF" C0201#5 -11975.34,11417.52 r90 top
C172 "CC_C0402_DISCRETE_4.7UF" C0402#3 -11923.3,11672.04 r0 top
C173 "CC_C0201_DISCRETE_100NF" C0201#5 -12067.62,11640.36 r180 top
C174 "CC_C0201_DISCRETE_10NF" C0201#5 -12073.34,11452.52 r90 top
C175 "CC_C0402_DISCRETE_4.7UF" C0402#3 -12069.76,11672.36 r180 top
C176 "CC_C0201_DISCRETE_100NF" C0201#5 -11980.34,11291.85 r90 top
C177 "CC_C0201_DISCRETE_1UF" C0201#5 -12170.76,10800.34 r0 top
C178 "CC_C0402_DISCRETE_4.7UF" C0402#3 -12021.2,10639.04 r0 top
C179 "CC_C0402_DISCRETE_4.7UF" C0402#3 -12170.76,10766.34 r0 top
C180 "CC_C0201_DISCRETE_100NF" C0201#5 -11987.66,11185.55 r270 top
C181 "CC_C0201_DISCRETE_100NF" C0201#5 -12098.34,11418.85 r90 top
C182 "CC_C0201_DISCRETE_100NF" C0201#5 -12092.15,11267.36 r180 top
C183 "CC_C0201_DISCRETE_100NF" C0201#5 -11961.66,11197.55 r270 top
C184 "CC_C0201_DISCRETE_100NF" C0201#5 -11917.85,11250.04 r0 top
C185 "CC_C0201_DISCRETE_100NF" C0201#5 -12039.66,11183.55 r270 top
C186 "CC_C0201_DISCRETE_100NF" C0201#5 -11909.34,11285.85 r90 top
C187 "CC_C0201_DISCRETE_100NF" C0201#5 -12018.85,11250.04 r0 top
C188 "CC_C0201_DISCRETE_100NF" C0201#5 -11927.85,11224.04 r0 top
C189 "CC_C0201_DISCRETE_100NF" C0201#5 -12016.85,11224.04 r0 top
C190 "CC_C0201_DISCRETE_100NF" C0201#5 -11922.34,11371.85 r90 top
C191 "CC_C0201_DISCRETE_100NF" C0201#5 -11934.66,11327.55 r270 top
C192 "CC_C0201_DISCRETE_100NF" C0201#5 -12022.85,11334.04 r0 top
C193 "CC_C0201_DISCRETE_100NF" C0201#5 -12113.3,11374.94 r225 top
C194 "CC_C0201_DISCRETE_100NF" C0201#5 -12099.34,11167.85 r90 top
C195 "CC_C0201_DISCRETE_100NF" C0201#5 -12020.85,11302.04 r0 top
C196 "CC_C0201_DISCRETE_100NF" C0201#5 -12021.85,11276.04 r0 top
C197 "CC_C0201_DISCRETE_100NF" C0201#5 -12057.48,11294.69 r270 top
C198 "CC_C0201_DISCRETE_100NF" C0201#5 -11998.34,11368.85 r90 top
C199 "CC_C0201_DISCRETE_100NF" C0201#5 -11954.34,11255.85 r90 top
C200 "CC_C0201_DISCRETE_100NF" C0201#5 -11944.85,11292.04 r0 top
C201 "CC_C0201_DISCRETE_100NF" C0201#5 -11936.17,11181.23 r270 top
C202 "CC_C0201_DISCRETE_100NF" C0201#5 -12013.66,11185.55 r270 top
C203 "CC_C0402_DISCRETE_10UF" C0402#3 -12170.76,10728.34 r0 top
C204 "CC_C0402_DISCRETE_1UF" C0402#2 -12114.6,12001.04 r180 bottom
C205 "CC_C0201_DISCRETE_100NF" C0201#5 -12133.12,11183.52 r135 top
C206 "CC_C0402_DISCRETE_4.7UF" C0402#3 -11933.88,10640.36 r180 top
C207 "CC_C0201_DISCRETE_1UF" C0201#5 -11933.7,10672.36 r180 top
C208 "CC_C0201_DISCRETE_100NF" C0201#5 -12025.34,11419.85 r90 top
C209 "CC_C0201_DISCRETE_100NF" C0201#5 -11934.15,10698.36 r180 top
C210 "CC_C0201_DISCRETE_100NF" C0201#5 -11978.34,11140.2 r90 top
C211 "CC_C0201_DISCRETE_100NF" C0201#5 -11846.5,11228.04 r0 top
C212 "CC_C0201_DISCRETE_100NF" C0201#5 -12073.66,11179.55 r270 top
C213 "CC_C0201_DISCRETE_100NF" C0201#5 -11882.34,11235.85 r90 top
C214 "CC_C0402_DISCRETE_4.7UF" C0402#3 -12020.92,10724.96 r180 top
C215 "CC_C0201_DISCRETE_1UF" C0201#5 -12018.7,10757.96 r180 top
C216 "CC_C0201_DISCRETE_100NF" C0201#5 -12053.34,11137.85 r90 top
C217 "CC_C0201_DISCRETE_100NF" C0201#5 -11899.66,11331.16 r270 top
C218 "CC_C0201_DISCRETE_100NF" C0201#5 -11883.51,11280.89 r90 top
C219 "CC_C0201_DISCRETE_100NF" C0201#5 -11891.15,11174.36 r180 top
C220 "CC_C0201_DISCRETE_100NF" C0201#5 -11944.82,11396.75 r225 top
C221 "CC_C0201_DISCRETE_100NF" C0201#5 -12019.66,11110.55 r270 top
C222 "CC_C0201_DISCRETE_100NF" C0201#5 -11867.25,11359.28 r135 top
C223 "CC_C0201_DISCRETE_100NF" C0201#5 -11877.34,11412.85 r90 top
C224 "CC_C0402_DISCRETE_4.7UF" C0402#1 -12409,10950.7 r90 bottom
C225 "CC_C0201_DISCRETE_1UF" C0201#2 -12377,10949.7 r90 bottom
C226 "CC_C0201_DISCRETE_100NF" C0201#5 -12094.34,11304.85 r90 top
C227 "CC_C0201_DISCRETE_100NF" C0201#5 -12092.15,11242.36 r180 top
C228 "CC_C0201_DISCRETE_100NF" C0201#5 -12092.71,11217.05 r180 top
C229 "CC_C0201_DISCRETE_100NF" C0201#2 -12392,11011.7 r270 bottom
C230 "CC_C0201_DISCRETE_100NF" C0201#2 -12365,11011.7 r270 bottom
C231 "CC_C0402_DISCRETE_10UF" C0402#1 -12446,10950.7 r90 bottom
C232 "CC_C0201_DISCRETE_10NF" C0201#1 -10994.48,10861.36 r0 bottom
C233 "CC_C0402_DISCRETE_1UF" C0402#1 -11044.64,10881.06 r90 bottom
C234 "CC_C0402_DISCRETE_100PF_" C0402#2 -10926.7,10863.36 r0 bottom
C235 "CC_C0402_DISCRETE_100PF" C0402#1 -10901.36,10634.64 r270 bottom
C236 "CC_C0201_DISCRETE_100NF" C0201#1 -10856.98,11567.86 r180 bottom
C237 "CC_C0402_DISCRETE_10UF" C0402#3 -11447.73,10366.27 r180 top
C238 "CC_C0402_DISCRETE_10UF" C0402#3 -11112,10385.66 r180 top
C239 "CC_C0201_DISCRETE_100NF" C0201#5 -11398.66,10182.2 r180 top
C240 "CC_C0201_DISCRETE_100NF" C0201#5 -11183.4,10370.93 r180 top
C241 "CC_C0201_DISCRETE_100NF" C0201#5 -11472.6,10254.87 r0 top
C242 "CC_C0201_DISCRETE_100NF" C0201#5 -11309.6,10469.67 r0 top
C243 "CC_C0201_DISCRETE_100NF" C0201#5 -11183.52,10279.52 r180 top
C244 "CC_C0402_DISCRETE_10UF" C0402#3 -11676.34,10281.64 r90 top
C245 "CC_C0201_DISCRETE_100NF" C0201#5 -11681.66,10216.5 r270 top
C247 "CC_C0201_DISCRETE_100NF" C0201#5 -11180.73,10220.66 r90 top
C248 "CC_C0201_DISCRETE_100NF" C0201#5 -11292.66,10182.06 r180 top
C249 "CC_C0201_DISCRETE_100NF" C0201#5 -11135.68,10460.28 r270 top
C250 "CC_C0402_DISCRETE_10UF" C0402#3 -11148.73,10235.66 r90 top
C251 "CC_C0201_DISCRETE_100NF" C0201#5 -11472.32,10228.92 r0 top
C252 "CC_C0402_DISCRETE_10UF" C0402#3 -11302.86,10233.66 r90 top
C253 "CC_C0201_DISCRETE_100NF" C0201#5 -10861.14,11890.06 r270 top
C254 "CC_C0201_DISCRETE_100NF" C0201#2 -10719.14,11226.02 r270 bottom
C255 "CC_C0201_DISCRETE_100NF" C0201#5 -10400.4,12098.5 r0 top
C256 "CC_C0402_DISCRETE_100PF" C0402#1 -10197,12245 r90 bottom
C257 "CC_C0402_DISCRETE_100PF" C0402#2 -10180,11877 r0 bottom
C258 "CC_C0603_DISCRETE_10UF" C0603#1 -11296.5,12121.96 r0 bottom
C259 "CC_C0201_DISCRETE_100NF" C0201#1 -11314,12177.7 r0 bottom
C260 "CC_C0201_DISCRETE_100NF" C0201#2 -12647.66,10714.8 r270 bottom
C261 "CC_C0402_DISCRETE_2.7PF" C0402#2 -11781.5,10168.86 r0 bottom
C262 "CC_C0201_DISCRETE_100NF" C0201#2 -10454,10285.15 r90 bottom
C263 "CC_C0402_DISCRETE_1UF" C0402#2 -11860.32,11975.36 r0 bottom
C264 "CC_C0201_DISCRETE_100NF" C0201#5 -11807,10421 r180 top
C265 "CC_C0402_DISCRETE_2.7PF" C0402#2 -11855.42,10168.86 r180 bottom
C266 "CC_C0201_DISCRETE_100NF" C0201#1 -11948.36,10664.34 r180 bottom
C267 "CC_C0201_DISCRETE_100NF" C0201#1 -12839,12191.7 r180 bottom
C268 "CC_C0603_DISCRETE_10UF" C0603#1 -12843,12235.7 r180 bottom
C269 "CC_C0201_DISCRETE_1NF" C0201#5 -11270.34,10219.66 r90 top
C270 "CC_C0201_DISCRETE_100NF" C0201#5 -12019.72,10786.52 r180 top
C271 "CC_C0402_DISCRETE_10UF" C0402#3 -11380.2,10233.66 r90 top
C272 "CC_C0201_DISCRETE_100NF" C0201#5 -11977.47,11094.7 r270 top
C273 "CC_C0201_DISCRETE_100NF" C0201#5 -12134,11305.17 r180 top
C274 "CC_C0201_DISCRETE_100NF" C0201#1 -11017,10263 r0 bottom
C275 "CC_C0402_DISCRETE_10UF" C0402#3 -11448.73,10290.4 r0 top
C276 "CC_C0201_DISCRETE_100NF" C0201#5 -11243.52,10219.68 r90 top
C294 "CC_C0201_DISCRETE_100NF" C0201#1 -11320,11649.82 r0 bottom
C295 "CC_C0201_DISCRETE_1UF" C0201#5 -11423.69,11892.56 r0 top
C296 "CC_C0201_DISCRETE_100NF" C0201#1 -11320,11707.05 r0 bottom
C297 "CC_C0201_DISCRETE_100NF" C0201#1 -11279,11785.79 r0 bottom
C298 "CC_C0201_DISCRETE_100NF" C0201#2 -11434.69,11898.84 r270 bottom
C299 "CC_C0402_DISCRETE_4.7UF" C0402#3 -11599.87,11947.75 r90 top
C300 "CC_C0201_DISCRETE_100NF" C0201#5 -11566.13,11937.08 r90 top
D1 "D_ESD_DIFFPAIR_USON10_0D5_2D5X1X0D5MM_DISCRETE_TPD4E05U06DQAR" USON10_0D5_2D5X1X0D5MM -10825,10086.37 r180 bottom
D2 "D_ESD_DIFFPAIR_USON10_0D5_2D5X1X0D5MM_DISCRETE_TPD4E05U06DQAR" USON10_0D5_2D5X1X0D5MM -10965,10086.37 r180 bottom
D3 "D_SOD_523_DISCRETE_RB520S30T1G" SOD_523#1 -10154.22,11641.65 r180 top
D4 "D_ESD_DIFFPAIR_USON10_0D5_2D5X1X0D5MM_DISCRETE_TPD4E05U06DQAR" USON10_0D5_2D5X1X0D5MM -11383.8,10086.37 r0 bottom
D5 "D_ESD_DIFFPAIR_USON10_0D5_2D5X1X0D5MM_DISCRETE_TPD4E05U06DQAR" USON10_0D5_2D5X1X0D5MM -11277.27,10086.37 r0 bottom
D6 "D_ESD_DIFFPAIR_USON10_0D5_2D5X1X0D5MM_DISCRETE_TPD4E05U06DQAR" USON10_0D5_2D5X1X0D5MM -11146.39,10086.37 r0 bottom
D7 "DIODE TVS BI-DIR_D0402_DISCRETE_TPD1E1B04DPY" D0402#1 -11590.75,10072.66 r180 top
D8 "DIODE TVS BI-DIR_D0402_DISCRETE_TPD1E1B04DPY" D0402#1 -12391,9606.92 r270 top
D9 "DIODE TVS BI-DIR_D0402_DISCRETE_TPD1E1B04DPY" D0402#1 -10637,10777.74 r0 top
D10 "DIODE TVS BI-DIR_D0402_DISCRETE_TPD1E1B04DPY" D0402#1 -12354,9606.92 r270 top
D11 "D_SOD_523_DISCRETE_RB520S30T1G" SOD_523#1 -10260.22,11641.65 r180 top
D12 "D_SOD_523_DISCRETE_RB520S30T1G" SOD_523#1 -10363.3,11641.65 r180 top
D13 "DIODE TVS BI-DIR_D0402_DISCRETE_TPD1E1B04DPY" D0402#1 -10637,10815.04 r0 top
D14 "DIODE TVS BI-DIR_D0402_DISCRETE_TPD1E1B04DPY" D0402#1 -10637,10852.76 r0 top
D15 "DIODE TVS BI-DIR_D0402_DISCRETE_TPD1E1B04DPY" D0402#1 -10637,10977.14 r0 top
D16 "DIODE TVS BI-DIR_D0402_DISCRETE_TPD1E1B04DPY" D0402#1 -10637,11014.28 r0 top
D17 "DIODE TVS BI-DIR_D0402_DISCRETE_TPD1E1B04DPY" D0402#1 -10637,11052.04 r0 top
D18 "DIODE TVS BI-DIR_D0402_DISCRETE_TPD1E1B04DPY" D0402#1 -10637,10740.04 r0 top
D19 "DIODE TVS BI-DIR_D0402_DISCRETE_TPD1E1B04DPY" D0402#1 -10983.98,11891.53 r0 top
D20 "DIODE TVS BI-DIR_D0402_DISCRETE_TPD1E1B04DPY" D0402#1 -11056.06,11892.47 r180 top
D21 "D_DO_214AC_SMA_DISCRETE_B130L-13-F" DO_214AC_SMA -10904,10573 r90 top
D22 "D_DO_214AC_SMA_DISCRETE_B130L-13-F" DO_214AC_SMA -10579,11559 r90 top
D23 "D_SOD_523_DISCRETE_RB520S30T1G" SOD_523#2 -12830.66,11651.9 r270 bottom
D24 "DIODE TVS BI-DIR_D0402_DISCRETE_TPD1E1B04DPY" D0402#1 -12703.66,9586.76 r270 top
D25 "DIODE TVS BI-DIR_D0402_DISCRETE_TPD1E1B04DPY" D0402#1 -12743.66,9586.72 r270 top
D26 "DIODE TVS BI-DIR_D0402_DISCRETE_TPD1E1B04DPY" D0402#1 -12097.66,10209.68 r270 top
D27 "DIODE TVS BI-DIR_X1SON2_0D65_1X0_6X0_45MM_DISCRETE_TPD1E0B04DPY" X1SON2_0D65_1X0_6X0_45MM#1 -9988.44,10781 r180 bottom
D28 "DIODE TVS BI-DIR_X1SON2_0D65_1X0_6X0_45MM_DISCRETE_TPD1E0B04DPY" X1SON2_0D65_1X0_6X0_45MM#1 -10239.35,10781 r0 bottom
D29 "DIODE TVS BI-DIR_D0402_DISCRETE_TPD1E1B04DPY" D0402#1 -10460.5,12097.34 r0 top
D30 "DIODE TVS BI-DIR_D0402_DISCRETE_TPD1E1B04DPY" D0402#1 -10546.34,12097.34 r180 top
D31 "DIODE TVS BI-DIR_D0402_DISCRETE_TPD1E1B04DPY" D0402#1 -11632,10835 r90 top
D32 "D_SOD_523_DISCRETE_RB520S30T1G" SOD_523#3 -10919.15,11644 r0 bottom
D33 "D_SOD_523_DISCRETE_RB520S30T1G" SOD_523#3 -10919.15,11727 r0 bottom
D34 "D_SOD_523_DISCRETE_RB520S30T1G" SOD_523#3 -10919.15,11765 r0 bottom
D35 "D_SOD_523_DISCRETE_RB520S30T1G" SOD_523#2 -10890,10328 r270 bottom
D36 "DIODE TVS BI-DIR_D0402_DISCRETE_TPD1E1B04DPY" D0402#1 -11466.79,11648 r180 top
D37 "DIODE TVS BI-DIR_D0402_DISCRETE_TPD1E1B04DPY" D0402#1 -11394,11648 r0 top
D38 "DIODE TVS BI-DIR_D0402_DISCRETE_TPD1E1B04DPY" D0402#1 -11251,11648 r0 top
D39 "DIODE TVS BI-DIR_D0402_DISCRETE_TPD1E1B04DPY" D0402#1 -11178,11648 r0 top
D40 "DIODE TVS BI-DIR_D0402_DISCRETE_TPD1E1B04DPY" D0402#2 -11111.21,11840 r180 bottom
D41 "DIODE TVS BI-DIR_D0402_DISCRETE_TPD1E1B04DPY" D0402#1 -11052.82,10672 r0 top
D42 "DIODE TVS BI-DIR_D0402_DISCRETE_TPD1E1B04DPY" D0402#1 -11147.79,10672 r180 top
D43 "DIODE TVS BI-DIR_D0402_DISCRETE_TPD1E1B04DPY" D0402#1 -11227.21,10672 r180 top
D44 "DIODE TVS BI-DIR_D0402_DISCRETE_TPD1E1B04DPY" D0402#1 -11359,10931 r0 top
D45 "DIODE TVS BI-DIR_D0402_DISCRETE_TPD1E1B04DPY" D0402#1 -11432,10931 r180 top
D46 "D_SOD_523_DISCRETE_RB520S30T1G" SOD_523#3 -10796.98,11665.85 r180 bottom
D47 "D_SOD_523_DISCRETE_RB520S30T1G" SOD_523#1 -12664.98,11866.36 r180 top
D48 "D_SOD_523_DISCRETE_RB520S30T1G" SOD_523#1 -12664.98,11828.42 r180 top
D49 "D_SOD_523_DISCRETE_RB520S30T1G" SOD_523#2 -12830.66,11751.73 r270 bottom
D50 "D_SOD_523_DISCRETE_RB520S30T1G" SOD_523#3 -10728.5,10519.95 r180 bottom
D51 "D_SOD_523_DISCRETE_RB520S30T1G" SOD_523#3 -10727.97,10481.95 r180 bottom
D52 "DIODE TVS BI-DIR_D0402_DISCRETE_TPD1E1B04DPY" D0402#2 -11036.21,11840 r0 bottom
D53 "D_SOD_523_DISCRETE_RB520S30T1G" SOD_523#3 -10796.98,11624 r180 bottom
D54 "D_SOD_523_DISCRETE_RB520S30T1G" SOD_523#3 -10919.15,11685.85 r0 bottom
D55 "D_SOD_523_DISCRETE_RB520S30T1G" SOD_523#3 -10845.77,10419.75 r180 bottom
D56 "D_SOD_523_DISCRETE_RB520S30T1G" SOD_523#1 -12664.98,11790 r180 top
D58 "D_SOD_523_DISCRETE_RB520S30T1G" SOD_523#2 -10930,10328 r270 bottom
D59 "D_SOD_523_DISCRETE_RB520S30T1G" SOD_523#2 -10851,10328 r270 bottom
D61 "D_SOD_523_DISCRETE_RB520S30T1G" SOD_523#1 -12016,9855 r270 top
D63 "D_SOD_523_DISCRETE_RB520S30T1G" SOD_523#1 -11676.23,10072.66 r0 top
D66 "D_SOD_523_DISCRETE_RB520S30T1G" SOD_523#3 -12908.08,11622.04 r180 bottom
D73 "DIODE TVS BI-DIR_X1SON2_0D65_1X0_6X0_45MM_DISCRETE_TPD1E0B04DPY" X1SON2_0D65_1X0_6X0_45MM#2 -10160,12213 r270 bottom
D74 "DIODE TVS BI-DIR_X1SON2_0D65_1X0_6X0_45MM_DISCRETE_TPD1E0B04DPY" X1SON2_0D65_1X0_6X0_45MM#2 -10126,11891 r90 bottom
F1 "FUSE_F0603_DISCRETE_100MA" F0603 -10952.93,10420 r180 bottom
FB1 "FB_L0402_DISCRETE_120R" L0402#1 -10623,12020 r270 top
FB2 "FB_L0402_DISCRETE_120R" L0402#2 -10344.2,11738.18 r90 bottom
FB4 "FB_L0402_DISCRETE_120R" L0402#1 -12918.04,11013.04 r0 top
FB5 "FB_L0402_DISCRETE_120R" L0402#3 -10496.22,11523.36 r0 bottom
FB6 "FB_L0402_DISCRETE_120R" L0402#1 -12170,10845.04 r0 top
FB7 "FB_L0402_DISCRETE_120R" L0402#1 -11851.68,11709.36 r180 top
FB8 "FB_L0402_DISCRETE_120R" L0402#1 -11996.08,11709.36 r180 top
FB9 "FB_L0402_DISCRETE_120R" L0402#2 -11794,10878 r270 bottom
FB10 "FB_L0402_DISCRETE_120R" L0402#1 -12233.48,11709.04 r0 top
FB11 "FB_L0402_DISCRETE_120R" L0402#1 -11578.66,11295.14 r270 top
FB12 "FB_L0402_DISCRETE_120R" L0402#1 -11511.22,10996.86 r180 top
FB13 "FB_L0402_DISCRETE_120R" L0402#1 -12179.46,10634.14 r180 top
FB14 "FB_L0402_DISCRETE_120R" L0402#1 -12146.48,11709.56 r0 top
FB15 "FB_L0402_DISCRETE_120R" L0402#1 -11923.04,11709.36 r180 top
FB16 "FB_L0402_DISCRETE_120R" L0402#1 -12069.28,11710.04 r0 top
FB17 "FB_L0402_DISCRETE_120R" L0402#2 -11081.96,10881.46 r270 bottom
FB18 "FB_L0402_DISCRETE_120R" L0402#1 -11447.73,10328.6 r0 top
FB19 "FB_L0402_DISCRETE_120R" L0402#1 -11418.8,10233.66 r90 top
FB20 "FB_L0402_DISCRETE_120R" L0402#1 -11483.32,10196.12 r0 top
FB21 "FB_L0402_DISCRETE_120R" L0402#3 -12746,12282.7 r180 bottom
FB22 "FB_L0402_DISCRETE_120R" L0402#1 -11212.27,10233.66 r90 top
FB23 "FB_L0402_DISCRETE_120R" L0402#1 -11341.34,10233.66 r90 top
FB24 "FB_L0402_DISCRETE_120R" L0402#1 -11112.04,10347.07 r0 top
FB29 "FB_L0402_DISCRETE_120R" L0402#1 -11651.73,11883.25 r0 top
FB30 "FB_L0402_DISCRETE_120R" L0402#1 -11482.31,11925.44 r180 top
FB31 "FB_L0402_DISCRETE_120R" L0402#1 -11600.15,11653.61 r0 top
FB32 "FB_L0402_DISCRETE_120R" L0402#2 -11312.61,11909.21 r270 bottom
FL2 "FB_L0402_DISCRETE_120R" L0402#3 -12114.5,11963.36 r0 bottom
J1 "MICROSD CARD_9+4P_MICRO_SD_ST_TF_003A_16_1X14_5MM_IO_ST-TF-003J" MICRO_SD_ST_TF_003A_16_1X14_5MM -10254,10933.85 r0 top
J2 "RJ11_6P4C_SHIELDED_RJ11_6P4C_1D27_21_15X13_8X13_3_IO_LPJE158-0CNL" RJ11_6P4C_1D27_21_15X13_8X13_3 -10358.42,9522.34 r0 top
J3 "RF ANT 3P_U-FL3P-SMD-2_6X2_6X1_0MM_IO_U.FL-R-SMT-1(10)" U-FL3P-SMD-2_6X2_6X1_0MM#1 -10063,12227 r180 bottom
J4 "HDMI_TYPE A_19P_HDMI19P_1D155_23_1X7_7X16_4MM_IO_TYPE_A" HDMI19P_1D155_23_1X7_7X16_4MM -11696.01,9559.16 r0 top
J5 "RF ANT 3P_U-FL3P-SMD-2_6X2_6X1_0MM_IO_U.FL-R-SMT-1(10)" U-FL3P-SMD-2_6X2_6X1_0MM#2 -10066,11809 r270 bottom
J6 "HEADER 1X3_HEADER3P_2D54_DIP_IO_HEADER 1X3 2.54MM" HEADER3P_2D54_DIP -12425.08,9411.76 r180 top
J7 "HEADER_4+2P_JST4P_SMD_2_0_90D_IO_4P-2.0MM-90D" JST4P_SMD_2_0_90D -10928.35,12187.54 r0 top
J8 "HEADER 40+2P_FPC40_0D5_25_4X5_25X2MM_IO_FPC 40PIN-0.5MM" FPC40_0D5_25_4X5_25X2MM -12453,12262.86 r180 top
J9 "RF ANT 3P_U-FL3P-SMD-2_6X2_6X1_0MM_IO_U.FL-R-SMT-1(10)" U-FL3P-SMD-2_6X2_6X1_0MM#2 -10225.57,10682.01 r270 bottom
J10 "BAT HOLDER 2P_BAT-CR1220_IO_CR1220" BAT-CR1220 -12578.16,10200.61 r90 top
J11 "HEADER 2X5_1_CONNECT10_1D27_12_4X6_7MM_IO_TC2050-IDC" CONNECT10_1D27_12_4X6_7MM -10263.16,10502.06 r0 top
J12 "RF ANT 3P_U-FL3P-SMD-2_6X2_6X1_0MM_IO_U.FL-R-SMT-1(10)" U-FL3P-SMD-2_6X2_6X1_0MM#2 -10002.22,10682.01 r270 bottom
J13 "SINGLE USB A_180D_USB7P_1R4_14X5R72MM_IO_ST-USB-117A" USB7P_1R4_14X5R72MM -12156,9378.5 r90 top
J14 "USB2.0_TYPE C_16+6P#1_USB2_0_TYPE_C_IO_TYPE-C 2.0" USB2_0_TYPE_C -12742.5,9335 r90 top
J16 "HEADER 1X2_HEADER2P_2D54_DIP_IO_HEADER 1X2 2.54MM" HEADER2P_2D54_DIP -12933.34,10013.66 r180 top
J17 "FPC 22+2P_FPC22_0D5_15_4X5_25X2MM_0D5_DX_NPWB_IO_FPC 22P 0.5MM" FPC22_0D5_15_4X5_25X2MM_0D5_DX_NPWB -11571.3,12267.54 r180 top
J18 "HEADER_4+2P_JST4P_1D0_6_5X4_35X3_1MM_IO_4P-1.0MM" JST4P_1D0_6_5X4_35X3_1MM -10433.73,12270.66 r180 top
J19 "HEADER 2X5_1_CONNECT10_1D27_12_4X6_7MM_IO_TC2050-IDC" CONNECT10_1D27_12_4X6_7MM -12749,10646.5 r180 top
J21 "HEADER MIKROBUS_MIKROBUS16_2D54_25_4X22_88X8_5MM_IO_MIKROBUS FEMALE" MIKROBUS16_2D54_25_4X22_88X8_5MM -11164.39,11289 r180 top
J24 "RJ45_LPJG0933H11NL_RJ45_18P_21_23X15_93X13_3MM_IO_LPJG0933H11NL" RJ45_18P_21_23X15_93X13_3MM -11027.58,9523.7 r0 top
L1 "CLT_L4P_2D54_9_2X6X5MM_DISCRETE_500UH" L4P_2D54_9_2X6X5MM -10454.66,10151.64 r270 top
L2 "CLT_L4P_2D54_9_2X6X5MM_DISCRETE_500UH" L4P_2D54_9_2X6X5MM -10200,10148.64 r270 top
L3 "L_L0805_DISCRETE_6.8UH" L0805 -10257.8,11585.78 r0 bottom
L4 "CL_L2012_DISCRETE_90R" L2012#1 -12156,9752.68 r270 top
L5 "L_L0201_DISCRETE_12NH" L0201#1 -10308.88,11106.34 r45 bottom
L6 "L_L0201_DISCRETE_1NH" L0201#2 -10269.23,11161.54 r135 bottom
L7 "L_L0201_DISCRETE_27NH" L0201#1 -10305.44,11143.69 r45 bottom
L8 "L_L0201_DISCRETE_4.7NH" L0201#3 -10353.09,10934 r90 bottom
L9 "L_L0201_DISCRETE_3.9NH" L0201#3 -10380.52,11009 r90 bottom
L10 "L_L0201_DISCRETE_1NH" L0201#2 -10287.92,11180.22 r135 bottom
L11 "L_L0201_DISCRETE_12NH" L0201#2 -10363.99,11104.14 r135 bottom
L12 "L_L0201_DISCRETE_2.5NH" L0201#3 -10380.52,10934 r270 bottom
L13 "CL_L2012_DISCRETE_90R" L2012#2 -12724.07,9608.11 r90 bottom
L14 "L_L1008_DISCRETE_0.33UH" L1008#1 -12269.8,9819.66 r0 bottom
L15 "CL_L2012_DISCRETE_90R" L2012#3 -12485.62,12231.3 r180 bottom
L16 "L_L1008_DISCRETE_0.47UH" L1008#2 -12459.66,10027.2 r270 bottom
L17 "L_L1008_DISCRETE_0.47UH" L1008#1 -12643.2,9997.34 r180 bottom
L18 "L_L1008_DISCRETE_0.47UH" L1008#1 -12100.8,10246.66 r0 bottom
L19 "L_L2016_DISCRETE_2.2UH" L2016 -11641.53,11898.5 r270 bottom
L20 "CL_L2012_DISCRETE_90R" L2012#3 -12485.46,12302.71 r180 bottom
LED1 "SINGLE LED_LED0402_DISCRETE_YELLOW" LED0402 -9907.76,9487.86 r0 top
LED2 "SINGLE LED_LED0402_DISCRETE_GREEN" LED0402 -9907.76,9456.22 r0 top
LED3 "SINGLE LED_LED0402_DISCRETE_GREEN" LED0402 -12928.18,10487.56 r0 top
LED4 "SINGLE LED_LED0402_DISCRETE_GREEN" LED0402 -12927.88,10450.86 r0 top
LED5 "SINGLE LED_LED0402_DISCRETE_GREEN" LED0402 -12927.88,10413.86 r0 top
LED6 "SINGLE LED_LED0402_DISCRETE_GREEN" LED0402 -12927.88,10377.56 r0 top
LED7 "SINGLE LED_LED0402_DISCRETE_GREEN" LED0402 -12927.88,10340.56 r0 top
LED8 "SINGLE LED_LED0402_DISCRETE_YELLOW" LED0402 -9907.76,9519.5 r0 top
LED9 "SINGLE LED_LED0402_DISCRETE_YELLOW" LED0402 -9907.76,9551.14 r0 top
LED10 "SINGLE LED_LED0402_DISCRETE_YELLOW" LED0402 -9907.76,9582.78 r0 top
LED11 "SINGLE LED_LED0402_DISCRETE_RED" LED0402 -9907.76,9614.42 r0 top
MH1 "MHOLE_PTH_3_125MM_5_DISCRETE_HOLE 3D125MM" PTH_3_125MM_5 -9965.3,9793 r0 top
MH2 "MHOLE_PTH_3_125MM_5_DISCRETE_HOLE 3D125MM" PTH_3_125MM_5 -12890,9793 r0 top
MH3 "MHOLE_PTH_3_125MM_5_DISCRETE_HOLE 3D125MM" PTH_3_125MM_5 -12890,12011.7 r0 top
MH4 "MHOLE_PTH_3_125MM_5_DISCRETE_HOLE 3D125MM" PTH_3_125MM_5 -9965.3,12011.7 r0 top
OSC1 "OSC_4P_X4-SMD-2_5X2_0X1_0MM_DISCRETE_32.768KHZ" X4-SMD-2_5X2_0X1_0MM -10321.3,12037.7 r180 top